# Allegro board hiveboard_v0_1.brd
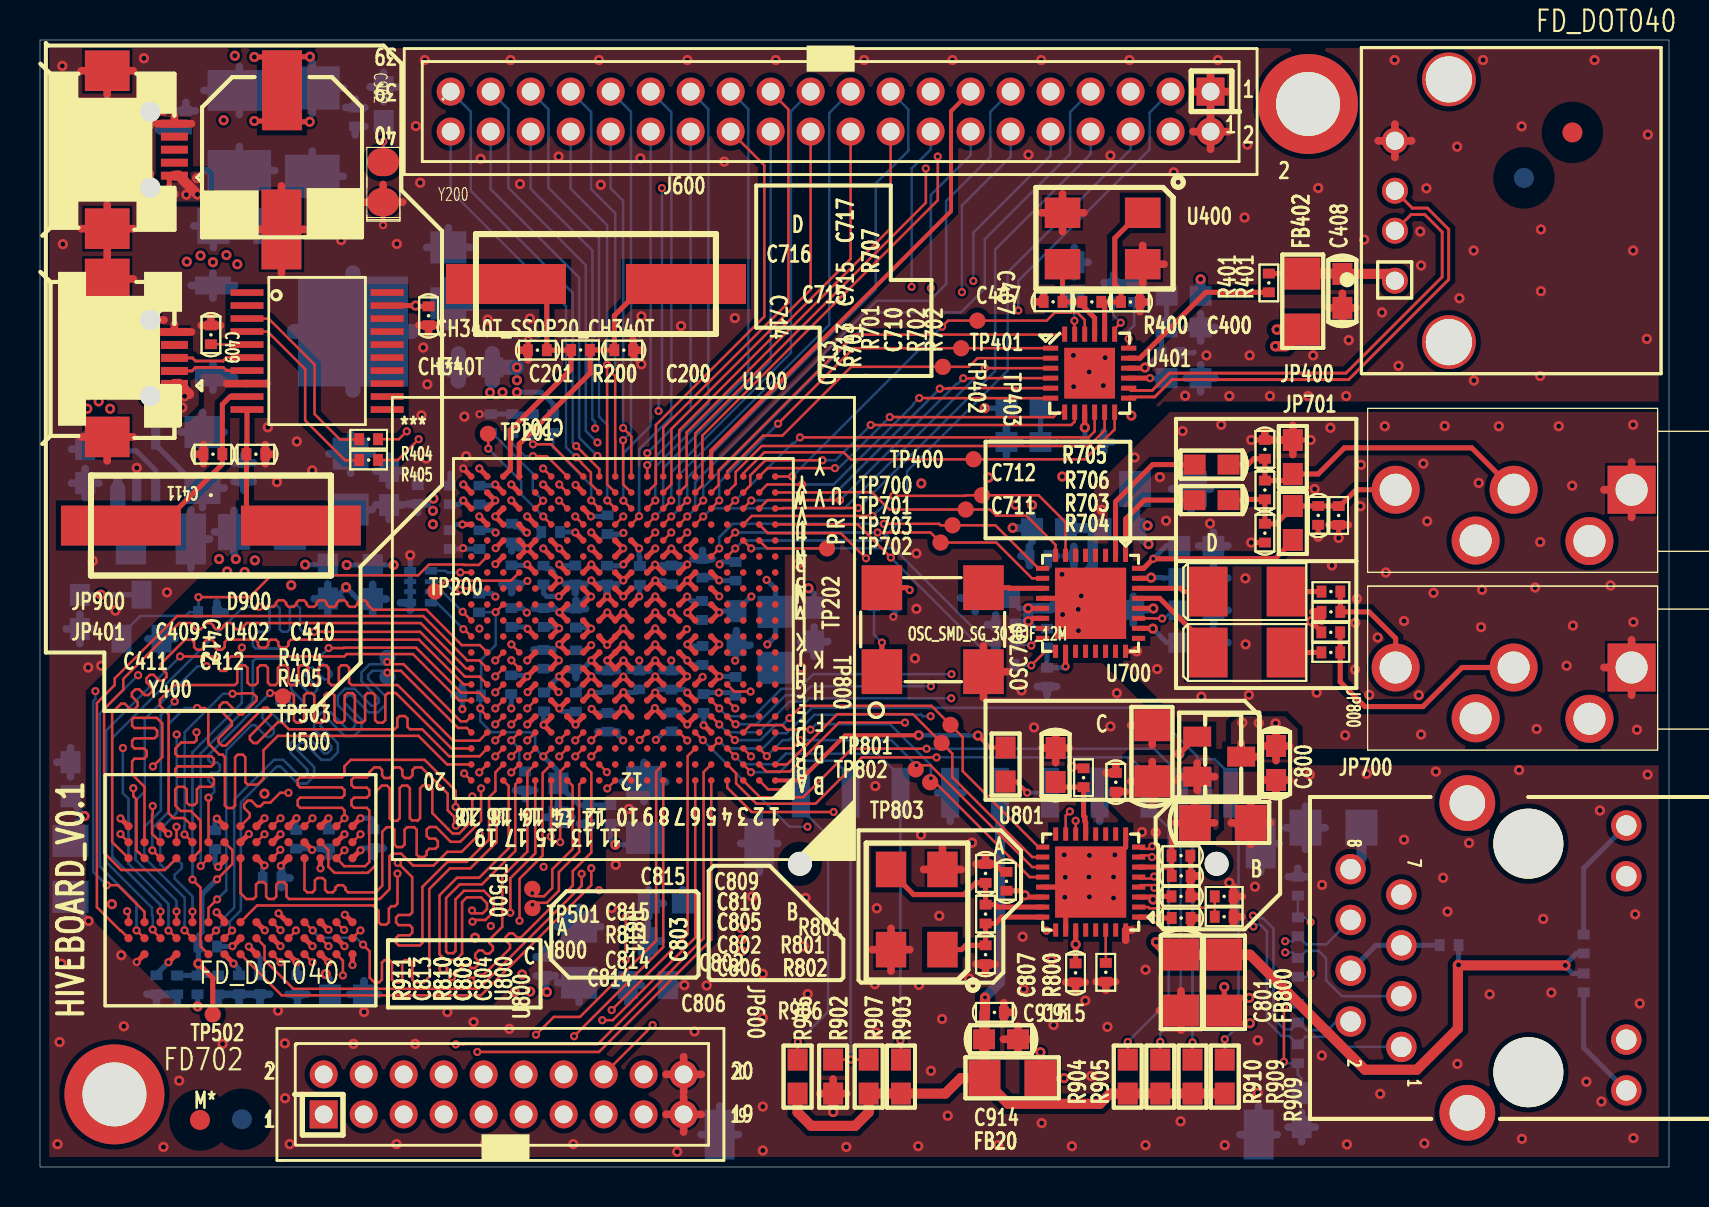
[diagram p0: board, top side]
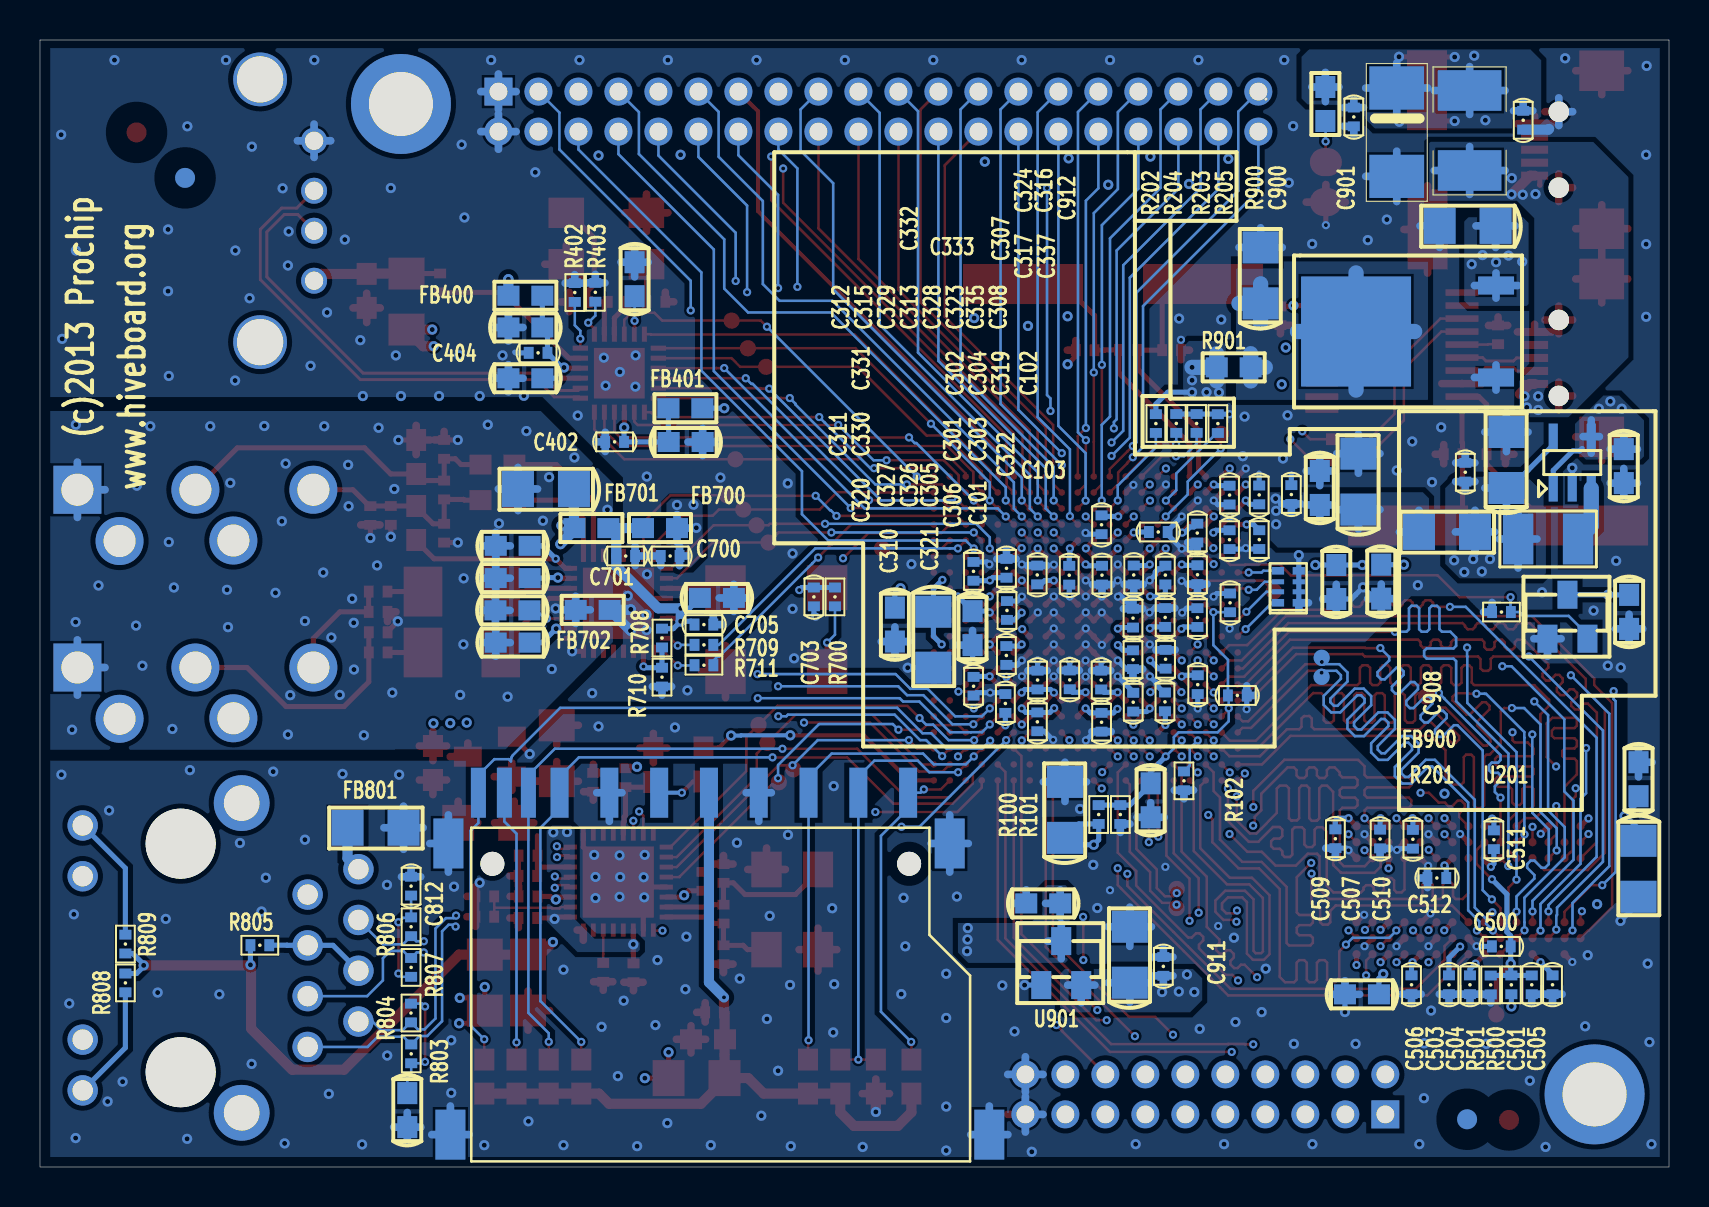
[diagram p1: board, bottom side, seen from below]

Outline 81.46 x 56.36 mm; copper layers: TOP, GND, INT1, VCC, GND1, BOTTOM. Coordinates in mm from the lower left corner of the outline.
Outline path: 20.17,53.39 20.14,53.42 ; 0,56.36 0,0 81.46,0 81.46,56.36 81.46,56.36 0,56.36

## Design rules (mm)
net group DP1: nets N27185589 N27185613
net group MATCH_LENTH_DQS0_DQS1: nets DDR_DQS1 DDR_DQS_B_1
net group USB: nets USB_DM USB_DP
net group MATCH_LENTH_ADD_ADD: nets DDR_BA0 DDR_BA1 DDR_BA2 DDR_CKE DDR_NCAS DDR_NCS DDR_NRAS DDR_NWE DDR_ODT T_DDR_A0 T_DDR_A1 T_DDR_A2 T_DDR_A3 T_DDR_A4 T_DDR_A5 T_DDR_A6 T_DDR_A7 T_DDR_A8 T_DDR_A9 T_DDR_A10 T_DDR_A11 T_DDR_A12 T_DDR_A13 T_DDR_A14
net group MATCH_LENTH_DQS0: nets DDR_CK DDR_NCK ETH_RXN ETH_RXP ETH_TXN ETH_TXP
net group MATCH_LENTH_DQS0_DQS0: nets DDR_DM0 DDR_DQS0 DDR_DQS_B_0 T_DDR_DQ0 T_DDR_DQ1 T_DDR_DQ2 T_DDR_DQ3 T_DDR_DQ4 T_DDR_DQ5 T_DDR_DQ6 T_DDR_DQ7
net group MATCH_LENTH_DQS1_DQS1: nets DDR_DM1 T_DDR_DQ8 T_DDR_DQ9 T_DDR_DQ10 T_DDR_DQ11 T_DDR_DQ12 T_DDR_DQ13 T_DDR_DQ14 T_DDR_DQ15

## Placement (name value [footprint] x y rotation side)
C100  1uF  [SC0603]  1.53 19.39 90 bottom
C101  0.1uF  [SC0402]  25.21 23.26 90 bottom
C102  0.1uF  [SC0402]  21.95 28.21 90 bottom
C103  0.01uF  [SC0402]  21.59 23.58 180 bottom
C104  1uF  [SC0603]  25.92 18.34 270 bottom
C200  20pF  [SC0402]  29.19 40.85 0 top
C201  20pF  [SC0402]  24.88 40.85 180 top
C202  0.1uF  [SC0603]  1.99 27.76 270 bottom
C300  10uF  [SC1206]  1.53 14.91 270 bottom
C301  0.1uF  [SC0402]  26.8 25.37 90 bottom
C302  0.1uF  [SC0402]  26.8 27.45 270 bottom
C303  0.1uF  [SC0402]  25.18 25.39 270 bottom
C304  0.1uF  [SC0402]  25.2 27.48 270 bottom
C305  0.01uF  [SC0402]  28.4 24.35 270 bottom
C306  0.01uF  [SC0402]  26.79 23.25 270 bottom
C307  0.01uF  [SC0402]  23.59 31.7 270 bottom
C308  0.1uF  [SC0402]  23.58 29.62 270 bottom
C309  1uF  [SC0603]  14.39 29.27 90 bottom
C310  0.1uF  [SC0402]  31.59 22.26 90 bottom
C311  0.1uF  [SC0402]  34.78 24.04 90 bottom
C312  0.1uF  [SC0402]  34.78 29.79 270 bottom
C313  0.01uF  [SC0402]  29.99 29.6 90 bottom
C314  10uF  [SC1206]  36.79 26.37 270 bottom
C315  0.01uF  [SC0402]  33.13 29.94 270 bottom
C316  0.01uF  [SC0402]  20.49 33.61 90 bottom
C317  0.01uF  [SC0402]  21.98 31.37 270 bottom
C318  1uF  [SC0603]  34.83 26.95 90 bottom
C319  0.1uF  [SC0402]  23.58 27.48 270 bottom
C320  0.1uF  [SC0402]  33.19 23.18 270 bottom
C321  0.01uF  [SC0402]  28.38 22.24 90 bottom
C322  0.01uF  [SC0402]  23.57 24.12 90 bottom
C323  0.1uF  [SC0402]  26.77 29.61 270 bottom
C324  0.1uF  [SC0402]  21.98 33.6 270 bottom
C325  1uF  [SC0603]  17.46 33.96 90 bottom
C326  0.1uF  [SC0402]  29.97 24.36 270 bottom
C327  0.1uF  [SC0402]  31.58 24.35 270 bottom
C328  0.1uF  [SC0402]  28.36 29.6 90 bottom
C329  0.1uF  [SC0402]  31.59 29.61 270 bottom
C330  0.01uF  [SC0402]  33.14 25.58 90 bottom
C331  0.01uF  [SC0402]  33.11 27.83 270 bottom
C332  0.1uF  [SC0402]  28.38 32.12 90 bottom
C333  0.1uF  [SC0402]  25.54 31.76 180 bottom
C334  1uF  [SC0603]  16.64 29.26 270 bottom
C335  0.1uF  [SC0402]  25.19 29.6 270 bottom
C336  1uF  [SC0603]  38.71 27.13 270 bottom
C337  0.1uF  [SC0402]  20.49 31.38 90 bottom
C400  12p/50V  [SC0402]  54.53 43.26 0 top
C401  1uF  [SC0603]  49.18 36.26 180 bottom
C402  0.1uF  [SC0402]  52.73 36.26 0 bottom
C403  4.7uF  [SC0603]  57.19 41.99 0 bottom
C404  0.1uF  [SC0402]  56.55 40.72 0 bottom
C405  1uF  [SC0603]  57.19 39.45 0 bottom
C406  1uF  [SC0603]  51.73 44.4 90 bottom
C407  12p/50V  [SC0402]  50.66 43.27 180 top
C408  2.2u/6.3V  [SC0603]  65.13 43.81 270 top
C409  0.01uF  [SC0402]  8.55 41.62 270 top
C410  0.1uF  [SC0402]  19.43 42.57 90 top
C411  22pF  [SC0402]  8.65 35.65 180 top
C412  22pF  [SC0402]  10.8 35.65 0 top
C500  0.1uF  [SC0402]  8.39 11.03 0 bottom
C501  0.01uF  [SC0402]  6.86 9.11 270 bottom
C502  10uF  [SC1206]  30.21 17.86 90 bottom
C503  0.1uF  [SC0402]  11 9.11 270 bottom
C504  0.1uF  [SC0402]  9.95 9.11 270 bottom
C505  0.1uF  [SC0402]  5.83 9.11 270 bottom
C506  0.01uF  [SC0402]  12.88 9.11 270 bottom
C507  0.01uF  [SC0402]  14.45 16.4 270 bottom
C508  1uF  [SC0603]  15.36 8.64 0 bottom
C509  0.1uF  [SC0402]  16.68 16.42 270 bottom
C510  0.1uF  [SC0402]  12.81 16.39 270 bottom
C511  0.01uF  [SC0402]  8.76 16.36 270 bottom
C512  0.01uF  [SC0402]  11.61 14.45 0 bottom
C700  0.1uF  [SC0402]  49.95 30.56 180 bottom
C701  0.1uF  [SC0402]  52.17 30.56 0 bottom
C702  10uF  [SC1206]  56.16 33.91 0 bottom
C703  0.1uF  [SC0402]  42.76 28.51 90 bottom
C704  4.7uF  [SC0603]  47.61 28.46 0 bottom
C705  0.1uF  [SC0402]  48.26 27.13 0 bottom
C706  4.7uF  [SC0603]  57.82 26.23 180 bottom
C707  4.7uF  [SC0603]  57.82 29.45 180 bottom
C708  4.7uF  [SC0603]  57.84 27.84 180 bottom
C709  4.7uF  [SC0603]  57.82 31.06 180 bottom
C710  220pF  [SC0402]  63.92 32.59 90 top
C711  47uF/16V  [SC3528]  58.4 25.73 0 top
C712  47uF/16V  [SC3528]  58.4 28.78 0 top
C713  33pF  [SC0402]  61.25 31.7 270 top
C714  1uF  [SC0603]  58.59 33.35 0 top
C715  33pF  [SC0402]  61.25 33.86 270 top
C716  1uF  [SC0603]  58.59 35.13 0 top
C717  33pF  [SC0402]  61.25 35.89 270 top
C800  4.7uF  [SC0603]  61.81 20.21 90 top
C801  10uF  [SC1206]  57.06 9.22 270 top
C802  0.1uF  [SC0402]  57.06 13.53 180 top
C803  0.01uF  [SC0402]  48.33 14.29 270 top
C804  10uF  [SC1206]  55.62 20.69 90 top
C805  0.1uF  [SC0402]  57.07 14.56 180 top
C806  0.1uF  [SC0402]  57.07 12.45 180 top
C807  0.1uF  [SC0402]  51.78 9.71 90 top
C808  0.01uF  [SC0402]  53.8 19.24 270 top
C809  10uF/6.3V  [SC1206]  59.15 17.21 0 top
C810  0.1uF  [SC0402]  57.06 15.57 180 top
C811  0.1uF  [SC0603]  63.09 2.84 270 bottom
C812  0.1uF  [SC0402]  62.9 14.05 270 bottom
C813  1uF  [SC0603]  50.79 20.1 90 top
C814  10pF  [SC0402]  47.28 10.62 270 top
C815  10pF  [SC0402]  47.28 14.68 90 top
C900  0.1uF  [SC0402]  15.76 52.51 90 bottom
C901  0.01uF  [SC0402]  7.29 52.35 90 bottom
C902  220uF/16V  [CAP_SMD65X65]  12.1 52.5 270 top
C903  10uF  [SC1206]  10.07 47.07 0 bottom
C904  22uF  [SC1206]  20.42 44.59 90 bottom
C905  4.7uF  [SC0603]  31.29 13.18 180 bottom
C906  4.7uF  [SC0603]  2.26 35.05 90 bottom
C907  10uF  [SC1206]  8.13 35.36 90 bottom
C908  0.1uF  [SC0402]  10.19 34.75 270 bottom
C909  10uF  [SC1206]  15.53 34.28 90 bottom
C910  10uF/6.3V  [SC1206]  26.96 10.62 90 bottom
C911  0.1uF  [SC0402]  25.29 10.03 270 bottom
C912  0.1uF  [SC0402]  18.89 33.63 270 bottom
C914  0.1uF  [SC0603]  48.06 6.39 0 top
C915  0.1uF  [SC0402]  47.73 7.73 180 top
D900  LED  [LED-0805]  17.16 50.25 90 top
F900  (2A, SMD, Poly Switch)  [FUSE5X5]  9.97 49.83 90 bottom
FB20  BLM21PG300SN1  [SR1206]  48.63 4.44 0 top
FB400  BLM21PG300SN1  [SR0603]  57.19 43.57 0 bottom
FB401  BLM21PG300SN1  [SR0603]  49.19 37.95 180 bottom
FB402  BLM21PG300SN1  [SR1206]  63.13 43.28 270 top
FB700  MU3261_471Y  [SR0603]  50.46 31.95 0 bottom
FB701  MU3261_471Y  [SR0603]  53.89 31.95 0 bottom
FB702  MU3261_471Y  [SR0603]  53.82 27.86 180 bottom
FB800  BLM21PG300SN1  [SR1206]  59.22 9.22 270 top
FB801  BLM21PG300SN1  500mA/0.1DCR  [SR1206]  64.68 16.97 0 bottom
FB900  BLM21PG300SN1  [SR1206]  11.1 31.76 0 bottom
FD503  FD_DOT040  [MARK]  10.1 2.39 180 bottom
FD700  FD_DOT040  [MARK]  74.21 49.47 180 bottom
FD701  FD_DOT040  [MARK]  76.63 51.74 0 top
FD702  FD_DOT040  [MARK]  8 2.35 0 top
J600  CON40A  [HD2X20_200]  39.54 52.78 180 top
JP400  USB TYPE A  [A_CN8-USB_A]  67.76 44.32 90 top
JP401  MINI-AB  [USB_MICRO_SMT]  6.72 39.16 90 top
JP600  HEADER 10X2  [HD2X10_200]  33.19 3.63 0 top
JP700  PHONOJACK STEREO_15  [EARJACK]  79.59 24.98 0 top
JP701  PHONOJACK STEREO_15  [EARJACK]  79.59 33.87 0 top
JP800  HR911105A  [HR911105_A]  74.43 10.46 270 top
JP900  MINI-AB  [USB_MICRO_SMT]  6.72 49.58 90 top
JP901  SD_HALF  [SD_CARD]  40.54 18.72 0 bottom
L900  2.2uH(LQH32CN2R2M33)  [SR1210]  6.05 31.41 0 bottom
NOREF  -  [unnamed]  3.72 3.63 0 top
NOREF#2  -  [unnamed]  63.41 53.16 0 top
OSC700  12M  [SG_3030JF]  44.64 26.87 0 top
R100  100K/1%  [SR0402]  28.52 17.63 270 bottom
R101  100K/1%  [SR0402]  27.44 17.63 90 bottom
R102  240R 1%  [SR0402]  24.26 19.31 90 bottom
R200  1M  [SR0402]  27.03 40.86 180 top
R201  100K  [SR0402]  8.38 27.75 0 bottom
R202  10K  [SR0402]  25.66 37.18 90 bottom
R203  10K  [SR0402]  23.62 37.19 270 bottom
R204  10K  [SR0402]  24.64 37.19 90 bottom
R205  10K  [SR0402]  22.56 37.18 270 bottom
R400  1M  [SR0402]  52.6 43.26 180 top
R401  1K  [SR0402]  61.45 44.21 90 top
R402  0R  [SR0402]  54.72 43.73 90 bottom
R403  8.06K/1%  [SR0402]  53.69 43.74 90 bottom
R404  0R  [SR0402]  16.43 36.4 0 top
R405  0R  [SR0402]  16.43 35.36 0 top
R500  100K/1%  [SR0402]  7.88 9.11 270 bottom
R501  100K/1%  [SR0402]  8.92 9.11 90 bottom
R700  1K  [SR0402]  41.71 28.51 270 bottom
R701  680R  [SR0603]  62.65 32.21 270 top
R702  47K  [SR0402]  64.94 32.58 270 top
R703  2.2K  [SR0402]  64.55 26.74 0 top
R704  16R  [SR0402]  64.55 25.73 180 top
R705  16R  [SR0402]  64.56 28.78 180 top
R706  2.2K  [SR0402]  64.56 27.76 180 top
R707  0R  [SR0603]  62.65 35.51 90 top
R708  100K  NC  [SR0402]  50.36 26.45 270 bottom
R709  0R  [SR0402]  48.26 26.11 0 bottom
R710  4.7K  [SR0402]  50.36 24.5 270 bottom
R711  0R  [SR0402]  48.26 25.09 0 bottom
R800  100K  [SR0402]  53.3 9.74 90 top
R801  24.3K  1%  [SR0402]  59.22 13.53 180 top
R802  24.9K  1%  [SR0402]  59.22 12.52 180 top
R803  49.9R  [SR0402]  62.9 5.66 90 bottom
R804  49.9R  [SR0402]  62.91 7.7 270 bottom
R805  0R  [SR0402]  70.47 11.09 180 bottom
R806  49.9R  [SR0402]  62.9 12.01 90 bottom
R807  49.9R  [SR0402]  62.9 9.98 270 bottom
R808  330R  [SR0402]  77.19 9.21 90 bottom
R809  330R  [SR0402]  77.19 11.15 270 bottom
R810  10K  [SR0402]  52.19 19.47 270 top
R811  10K  [SR0402]  47.28 12.65 270 top
R900  1K  [SR0603]  17.18 53.16 270 bottom
R901  0R  [SR0603]  21.77 39.99 180 bottom
R902  470k  [SR0603]  39.66 4.52 270 top
R903  4.7k  [SR0603]  43.05 4.52 270 top
R904  100k  [SR0603]  54.4 4.52 270 top
R905  100k  [SR0603]  56.02 4.52 270 top
R906  100k  [SR0603]  37.89 4.52 270 top
R907  NC  [SR0603]  41.44 4.52 270 top
R909  100k  [SR0603]  59.25 4.52 270 top
R910  100k  [SR0603]  57.63 4.52 270 top
R911  22R  [SR0603]  48.29 20.13 270 top
RN100  10Kx4  [SRN8]  19.03 29.02 90 bottom
TP200  TP_SS  [TP_08MM]  19.76 28.78 0 top
TP201  TP_SS  [TP_08MM]  22.4 36.67 0 top
TP202  TP_SS  [TP_08MM]  39.36 30.94 0 top
TP400  TP_SS  [TP_08MM]  46.69 35.39 0 top
TP401  TP_SS  [TP_08MM]  46.88 42.33 0 top
TP402  TP_SS  [TP_08MM]  45.15 40.02 0 top
TP403  TP_SS  [TP_08MM]  46.06 40.94 0 top
TP500  TP_SS  [TP_08MM]  24.62 13.91 0 top
TP501  TP_SS  [TP_08MM]  24.63 12.95 0 top
TP502  TP_SS  [TP_08MM]  8.64 7.63 0 top
TP503  TP_SS  [TP_08MM]  12.15 23.53 0 top
TP504  TP_SS  [TP_08MM]  17.37 25.47 180 bottom
TP505  TP_SS  [TP_08MM]  17.37 24.51 180 bottom
TP700  TP_SS  [TP_08MM]  47.11 33.59 0 top
TP701  TP_SS  [TP_08MM]  46.29 32.88 0 top
TP702  TP_SS  [TP_08MM]  45.04 31.23 0 top
TP703  TP_SS  [TP_08MM]  45.63 32.09 0 top
TP800  TP_SS  [TP_08MM]  45.53 22.11 0 top
TP801  TP_SS  [TP_08MM]  45.09 21.21 0 top
TP802  TP_SS  [TP_08MM]  43.79 19.89 0 top
TP803  TP_SS  [TP_08MM]  44.51 19.24 0 top
U100  SEP6200  [BGA400-080_1700X1700]  29.17 26.93 180 top
U201  CAT809_EUR-R  [SOT23]  5.08 27.52 180 bottom
U400  26M  [SX4_35X60]  55.14 47.72 180 top
U401  USB3343-CP-TR  [QFN24]  52.49 39.7 0 top
U402  CH340T  [SSOP20]  13.86 40.8 0 top
U500  HY5PS1G1631C  [A_FBGA84_E]  15.63 17.04 180 top
U700  WM8976  [QFN32]  52.54 28.19 270 top
U800  BL8552CB3TR12/AME8822AEEV180Z  [SOT23]  58.97 20.52 270 top
U801  AW6688  [QFN32]  52.54 14.25 180 top
U900  BL1085-33CY  [TO_252]  8.65 39.48 90 bottom
U901  BL8552CB3TR18/AME8822AEEV180Z  [SOT23]  30.39 10.2 180 bottom
U902  RT8008-12PB  [SOT23_5]  4.84 35.23 90 bottom
Y200  HC-49SMA  [XTAL2-200_SMT]  23.3 44.16 0 top
Y400  HC-49SMA  [XTAL2-200_SMT]  13.05 32.08 180 top
Y800  HCX-6SB_25Mhz  [SX4_35X60]  45.13 10.87 90 top
ZD900  1SMB5920BT3G  [SMB403A]  13.62 49.54 90 bottom

## Library data of the parts
C100-C104 C200 C201 C301-C313 C315-C337 C411 C412 C500 C501 C503-C512 = CAP NP_0
C202 C401-C406 C408-C410 C700 C701 C703-C710 C713-C717 C800 C802 C803 C805-C808 C810-C815 C900 C901 C905 C906 C908 C911 C912 C915 = CAP NP
C300 C314 C502 C702 C711 C712 C801 C804 C809 C902-C904 C907 C909 C910 = CAP POL
C400 C407 = CAPACITOR NON-POL
C914 = CAPNP
D900 = LED
F900 = FUSE
FB20 FB400-FB402 FB700-FB702 FB800 FB801 FB900 = FB
FD503 FD700-FD702 = FD_DOT040
J600 = CON40A
JP400 = USB TYPE A
JP401 JP900 = USB TYPE MICRO_AB
JP600 = HEADER 10X2
JP700 JP701 = PHONOJACK STEREO_15
JP800 = HR911105A_4
JP901 = SD_HALF
L900 = INDUCTOR
OSC700 = OSC_SMD
R100-R102 R200 R202-R205 R500 R501 R800-R811 R901 = R_0
R201 R400-R405 R700-R711 R900 R902-R907 R909-R911 = R
RN100 = RESAR_IS_4_SM
TP200-TP202 TP400-TP403 TP500-TP505 TP700-TP703 TP800-TP803 = TP_SS
U100 = SEP0611
U201 = CAT809
U400 = CRYSTAL_0
U401 = USB3343
U402 = CH340T: Tolerance: ***; User Part Number: ***
U500 = MT47H128M16_0
U700 = WM8976_0
U800 U900 U901 = BL1085
U801 = AW6688
U902 = LTC3406_V
Y200 Y400 = CRYSTAL
Y800 = CRYSTAL_1
ZD900 = ZD

## Footprints (pads in the part's own frame, mm; a bottom-side part is the same pattern mirrored in y, then rotated)
A_CN8-USB_A
  round 2.69 hole 2.31: (-3.07,-2.7) (10.07,-2.7)
  round 1.3 hole 0.91: 1(0,0) 2(2.5,0) 3(4.5,0) 4(7,0)
A_FBGA84_E
  round 0.41 smd: A1(0,0) A2(0,0.8) A3(0,1.6) A7(0,4.8) A8(0,5.6) A9(0,6.4) B1(0.8,0) B2(0.8,0.8) B3(0.8,1.6) B7(0.8,4.8) B8(0.8,5.6) B9(0.8,6.4) C1(1.6,0) C2(1.6,0.8) C3(1.6,1.6) C7(1.6,4.8) C8(1.6,5.6) C9(1.6,6.4) D1(2.4,0) D2(2.4,0.8) D3(2.4,1.6) D7(2.4,4.8) D8(2.4,5.6) D9(2.4,6.4) E1(3.2,0) E2(3.2,0.8) E3(3.2,1.6) E7(3.2,4.8) E8(3.2,5.6) E9(3.2,6.4) F1(4,0) F2(4,0.8) F3(4,1.6) F7(4,4.8) F8(4,5.6) F9(4,6.4) G1(4.8,0) G2(4.8,0.8) G3(4.8,1.6) G7(4.8,4.8) G8(4.8,5.6) G9(4.8,6.4) H1(5.6,0) H2(5.6,0.8) H3(5.6,1.6) H7(5.6,4.8) H8(5.6,5.6) H9(5.6,6.4) J1(6.4,0) J2(6.4,0.8) J3(6.4,1.6) J7(6.4,4.8) J8(6.4,5.6) J9(6.4,6.4) K2(7.2,0.8) K3(7.2,1.6) K7(7.2,4.8) K8(7.2,5.6) K9(7.2,6.4) L1(8,0) L2(8,0.8) L3(8,1.6) L7(8,4.8) L8(8,5.6) M2(8.8,0.8) M3(8.8,1.6) M7(8.8,4.8) M8(8.8,5.6) M9(8.8,6.4) N1(9.6,0) N2(9.6,0.8) N3(9.6,1.6) N7(9.6,4.8) N8(9.6,5.6) P2(10.4,0.8) P3(10.4,1.6) P7(10.4,4.8) P8(10.4,5.6) P9(10.4,6.4) R1(11.2,0) R2(11.2,0.8) R3(11.2,1.6) R7(11.2,4.8) R8(11.2,5.6)
BGA400-080_1700X1700
  round 0.33 smd: A1(-7.6,7.6) A2(-6.8,7.6) A3(-6,7.6) A4(-5.2,7.6) A5(-4.4,7.6) A6(-3.6,7.6) A7(-2.8,7.6) A8(-2,7.6) A9(-1.2,7.6) A10(-0.4,7.6) A11(0.4,7.6) A12(1.2,7.6) A13(2,7.6) A14(2.8,7.6) A15(3.6,7.6) A16(4.4,7.6) A17(5.2,7.6) A18(6,7.6) A19(6.8,7.6) A20(7.6,7.6) B1(-7.6,6.8) B2(-6.8,6.8) B3(-6,6.8) B4(-5.2,6.8) B5(-4.4,6.8) B6(-3.6,6.8) B7(-2.8,6.8) B8(-2,6.8) B9(-1.2,6.8) B10(-0.4,6.8) B11(0.4,6.8) B12(1.2,6.8) B13(2,6.8) B14(2.8,6.8) B15(3.6,6.8) B16(4.4,6.8) B17(5.2,6.8) B18(6,6.8) B19(6.8,6.8) B20(7.6,6.8) C1(-7.6,6) C2(-6.8,6) C3(-6,6) C4(-5.2,6) C5(-4.4,6) C6(-3.6,6) C7(-2.8,6) C8(-2,6) C9(-1.2,6) C10(-0.4,6) C11(0.4,6) C12(1.2,6) C13(2,6) C14(2.8,6) C15(3.6,6) C16(4.4,6) C17(5.2,6) C18(6,6) C19(6.8,6) C20(7.6,6) D1(-7.6,5.2) D2(-6.8,5.2) D3(-6,5.2) D4(-5.2,5.2) D5(-4.4,5.2) D6(-3.6,5.2) D7(-2.8,5.2) D8(-2,5.2) D9(-1.2,5.2) D10(-0.4,5.2) D11(0.4,5.2) D12(1.2,5.2) D13(2,5.2) D14(2.8,5.2) D15(3.6,5.2) D16(4.4,5.2) D17(5.2,5.2) D18(6,5.2) D19(6.8,5.2) D20(7.6,5.2) E1(-7.6,4.4) E2(-6.8,4.4) E3(-6,4.4) E4(-5.2,4.4) E5(-4.4,4.4) E6(-3.6,4.4) E7(-2.8,4.4) E8(-2,4.4) E9(-1.2,4.4) E10(-0.4,4.4) E11(0.4,4.4) E12(1.2,4.4) E13(2,4.4) E14(2.8,4.4) E15(3.6,4.4) E16(4.4,4.4) E17(5.2,4.4) E18(6,4.4) E19(6.8,4.4) E20(7.6,4.4) F1(-7.6,3.6) F2(-6.8,3.6) F3(-6,3.6) F4(-5.2,3.6) F5(-4.4,3.6) F6(-3.6,3.6) F7(-2.8,3.6) F8(-2,3.6) F9(-1.2,3.6) F10(-0.4,3.6) F11(0.4,3.6) F12(1.2,3.6) F13(2,3.6) F14(2.8,3.6) F15(3.6,3.6) F16(4.4,3.6) F17(5.2,3.6) F18(6,3.6) F19(6.8,3.6) F20(7.6,3.6) G1(-7.6,2.8) G2(-6.8,2.8) G3(-6,2.8) G4(-5.2,2.8) G5(-4.4,2.8) G6(-3.6,2.8) G7(-2.8,2.8) G8(-2,2.8) G9(-1.2,2.8) G10(-0.4,2.8) G11(0.4,2.8) G12(1.2,2.8) G13(2,2.8) G14(2.8,2.8) G15(3.6,2.8) G16(4.4,2.8) G17(5.2,2.8) G18(6,2.8) G19(6.8,2.8) G20(7.6,2.8) H1(-7.6,2) H2(-6.8,2) H3(-6,2) H4(-5.2,2) H5(-4.4,2) H6(-3.6,2) H7(-2.8,2) H8(-2,2) H9(-1.2,2) H10(-0.4,2) H11(0.4,2) H12(1.2,2) H13(2,2) H14(2.8,2) H15(3.6,2) H16(4.4,2) H17(5.2,2) H18(6,2) H19(6.8,2) H20(7.6,2) J1(-7.6,1.2) J2(-6.8,1.2) J3(-6,1.2) J4(-5.2,1.2) J5(-4.4,1.2) J6(-3.6,1.2) J7(-2.8,1.2) J8(-2,1.2) J9(-1.2,1.2) J10(-0.4,1.2) J11(0.4,1.2) J12(1.2,1.2) J13(2,1.2) J14(2.8,1.2) J15(3.6,1.2) J16(4.4,1.2) J17(5.2,1.2) J18(6,1.2) J19(6.8,1.2) J20(7.6,1.2) K1(-7.6,0.4) K2(-6.8,0.4) K3(-6,0.4) K4(-5.2,0.4) K5(-4.4,0.4) K6(-3.6,0.4) K7(-2.8,0.4) K8(-2,0.4) K9(-1.2,0.4) K10(-0.4,0.4) K11(0.4,0.4) K12(1.2,0.4) K13(2,0.4) K14(2.8,0.4) K15(3.6,0.4) K16(4.4,0.4) K17(5.2,0.4) K18(6,0.4) K19(6.8,0.4) K20(7.6,0.4) L1(-7.6,-0.4) L2(-6.8,-0.4) L3(-6,-0.4) L4(-5.2,-0.4) L5(-4.4,-0.4) L6(-3.6,-0.4) L7(-2.8,-0.4) L8(-2,-0.4) L9(-1.2,-0.4) L10(-0.4,-0.4) L11(0.4,-0.4) L12(1.2,-0.4) L13(2,-0.4) L14(2.8,-0.4) L15(3.6,-0.4) L16(4.4,-0.4) L17(5.2,-0.4) L18(6,-0.4) L19(6.8,-0.4) L20(7.6,-0.4) M1(-7.6,-1.2) M2(-6.8,-1.2) M3(-6,-1.2) M4(-5.2,-1.2) M5(-4.4,-1.2) M6(-3.6,-1.2) M7(-2.8,-1.2) M8(-2,-1.2) M9(-1.2,-1.2) M10(-0.4,-1.2) M11(0.4,-1.2) M12(1.2,-1.2) M13(2,-1.2) M14(2.8,-1.2) M15(3.6,-1.2) M16(4.4,-1.2) M17(5.2,-1.2) M18(6,-1.2) M19(6.8,-1.2) M20(7.6,-1.2) N1(-7.6,-2) N2(-6.8,-2) N3(-6,-2) N4(-5.2,-2) N5(-4.4,-2) N6(-3.6,-2) N7(-2.8,-2) N8(-2,-2) N9(-1.2,-2) N10(-0.4,-2) N11(0.4,-2) N12(1.2,-2) N13(2,-2) N14(2.8,-2) N15(3.6,-2) N16(4.4,-2) N17(5.2,-2) N18(6,-2) N19(6.8,-2) N20(7.6,-2) P1(-7.6,-2.8) P2(-6.8,-2.8) P3(-6,-2.8) P4(-5.2,-2.8) P5(-4.4,-2.8) P6(-3.6,-2.8) P7(-2.8,-2.8) P8(-2,-2.8) P9(-1.2,-2.8) P10(-0.4,-2.8) P11(0.4,-2.8) P12(1.2,-2.8) P13(2,-2.8) P14(2.8,-2.8) P15(3.6,-2.8) P16(4.4,-2.8) P17(5.2,-2.8) P18(6,-2.8) P19(6.8,-2.8) P20(7.6,-2.8) R1(-7.6,-3.6) R2(-6.8,-3.6) R3(-6,-3.6) R4(-5.2,-3.6) R5(-4.4,-3.6) R6(-3.6,-3.6) R7(-2.8,-3.6) R8(-2,-3.6) R9(-1.2,-3.6) R10(-0.4,-3.6) R11(0.4,-3.6) R12(1.2,-3.6) R13(2,-3.6) R14(2.8,-3.6) R15(3.6,-3.6) R16(4.4,-3.6) R17(5.2,-3.6) R18(6,-3.6) R19(6.8,-3.6) R20(7.6,-3.6) T1(-7.6,-4.4) T2(-6.8,-4.4) T3(-6,-4.4) T4(-5.2,-4.4) T5(-4.4,-4.4) T6(-3.6,-4.4) T7(-2.8,-4.4) T8(-2,-4.4) T9(-1.2,-4.4) T10(-0.4,-4.4) T11(0.4,-4.4) T12(1.2,-4.4) T13(2,-4.4) T14(2.8,-4.4) T15(3.6,-4.4) T16(4.4,-4.4) T17(5.2,-4.4) T18(6,-4.4) T19(6.8,-4.4) T20(7.6,-4.4) U1(-7.6,-5.2) U2(-6.8,-5.2) U3(-6,-5.2) U4(-5.2,-5.2) U5(-4.4,-5.2) U6(-3.6,-5.2) U7(-2.8,-5.2) U8(-2,-5.2) U9(-1.2,-5.2) U10(-0.4,-5.2) U11(0.4,-5.2) U12(1.2,-5.2) U13(2,-5.2) U14(2.8,-5.2) U15(3.6,-5.2) U16(4.4,-5.2) U17(5.2,-5.2) U18(6,-5.2) U19(6.8,-5.2) U20(7.6,-5.2) V1(-7.6,-6) V2(-6.8,-6) V3(-6,-6) V4(-5.2,-6) V5(-4.4,-6) V6(-3.6,-6) V7(-2.8,-6) V8(-2,-6) V9(-1.2,-6) V10(-0.4,-6) V11(0.4,-6) V12(1.2,-6) V13(2,-6) V14(2.8,-6) V15(3.6,-6) V16(4.4,-6) V17(5.2,-6) V18(6,-6) V19(6.8,-6) V20(7.6,-6) W1(-7.6,-6.8) W2(-6.8,-6.8) W3(-6,-6.8) W4(-5.2,-6.8) W5(-4.4,-6.8) W6(-3.6,-6.8) W7(-2.8,-6.8) W8(-2,-6.8) W9(-1.2,-6.8) W10(-0.4,-6.8) W11(0.4,-6.8) W12(1.2,-6.8) W13(2,-6.8) W14(2.8,-6.8) W15(3.6,-6.8) W16(4.4,-6.8) W17(5.2,-6.8) W18(6,-6.8) W19(6.8,-6.8) W20(7.6,-6.8) Y1(-7.6,-7.6) Y2(-6.8,-7.6) Y3(-6,-7.6) Y4(-5.2,-7.6) Y5(-4.4,-7.6) Y6(-3.6,-7.6) Y7(-2.8,-7.6) Y8(-2,-7.6) Y9(-1.2,-7.6) Y10(-0.4,-7.6) Y11(0.4,-7.6) Y12(1.2,-7.6) Y13(2,-7.6) Y14(2.8,-7.6) Y15(3.6,-7.6) Y16(4.4,-7.6) Y17(5.2,-7.6) Y18(6,-7.6) Y19(6.8,-7.6) Y20(7.6,-7.6)
CAP_SMD65X65
  rect 4x2 smd: 1(-1.35,0) 2(5.61,-0.03)
EARJACK
  rect 2.4x2.4 hole 1.6: 1(0,0)
  round 2.4 hole 1.6: 2(-5.9,0) 3(-11.801,0) 4(-7.8,-2.54) 5(-2.108,-2.565)
FUSE5X5
  rect 2.03x3.18 smd: 1(0,0) 2(4,0)
HD2X10_200
  rect 1.4x1.4 hole 0.89: 1(-19,-1)
  round 1.4 hole 0.89: 2(-19,1) 3(-17,-1) 4(-17,1) 5(-15,-1) 6(-15,1) 7(-13,-1) 8(-13,1) 9(-11,-1) 10(-11,1) 11(-9,-1) 12(-9,1) 13(-7,-1) 14(-7,1) 15(-5,-1) 16(-5,1) 17(-3,-1) 18(-3,1) 19(-1,-1) 20(-1,1)
HD2X20_200
  rect 1.4x1.4 hole 0.89: 1(-19,-1)
  round 1.4 hole 0.89: 2(-19,1) 3(-17,-1) 4(-17,1) 5(-15,-1) 6(-15,1) 7(-13,-1) 8(-13,1) 9(-11,-1) 10(-11,1) 11(-9,-1) 12(-9,1) 13(-7,-1) 14(-7,1) 15(-5,-1) 16(-5,1) 17(-3,-1) 18(-3,1) 19(-1,-1) 20(-1,1) 21(1,-1) 22(1,1) 23(3,-1) 24(3,1) 25(5,-1) 26(5,1) 27(7,-1) 28(7,1) 29(9,-1) 30(9,1) 31(11,-1) 32(11,1) 33(13,-1) 34(13,1) 35(15,-1) 36(15,1) 37(17,-1) 38(17,1) 39(19,-1) 40(19,1)
HR911105_A
  round 3.5 hole 3.5 unplated: (-5.715,0) (5.715,0)
  round 1.52 hole 1.02: 1(4.45,-6.35) 2(3.18,-8.89) 3(1.91,-6.35) 4(0.64,-8.89) 5(-0.63,-6.35) 6(-1.9,-8.89) 7(-3.17,-6.35) 8(-4.44,-8.89) 9(6.624,4.9) 10(4.084,4.9) 11(-4.084,4.9) 12(-6.624,4.9)
  round 2.79 hole 1.78: 15(-7.744,-3.051) 16(7.744,-3.051)
LED-0805
  custom 1.4x1.6 smd: 1(0,0) 2(-1.999,0)
MARK
  round 1 smd: 1(0,0)
QFN24
  rect 0.76x0.25 smd: 1(-1.951,1.25) 2(-1.951,0.749) 3(-1.951,0.249) 4(-1.951,-0.249) 5(-1.951,-0.749) 6(-1.951,-1.25) 13(1.951,-1.25) 14(1.951,-0.749) 15(1.951,-0.249) 16(1.951,0.249) 17(1.951,0.749) 18(1.951,1.25)
  rect 0.25x0.76 smd: 7(-1.25,-1.951) 8(-0.749,-1.951) 9(-0.249,-1.951) 10(0.249,-1.951) 11(0.749,-1.951) 12(1.25,-1.951) 19(1.25,1.951) 20(0.749,1.951) 21(0.249,1.951) 22(-0.249,1.951) 23(-0.749,1.951) 24(-1.25,1.951)
  rect 2.54x2.54 smd: 25(0,0)
QFN32
  rect 0.66x0.25 smd: 1(-2.4,1.75) 2(-2.4,1.25) 3(-2.4,0.75) 4(-2.4,0.25) 5(-2.4,-0.25) 6(-2.4,-0.75) 7(-2.4,-1.25) 8(-2.4,-1.75) 17(2.4,-1.75) 18(2.4,-1.25) 19(2.4,-0.75) 20(2.4,-0.25) 21(2.4,0.25) 22(2.4,0.75) 23(2.4,1.25) 24(2.4,1.75)
  rect 0.25x0.66 smd: 9(-1.75,-2.4) 10(-1.25,-2.4) 11(-0.75,-2.4) 12(-0.25,-2.4) 13(0.25,-2.4) 14(0.75,-2.4) 15(1.25,-2.4) 16(1.75,-2.4) 25(1.75,2.4) 26(1.25,2.4) 27(0.75,2.4) 28(0.25,2.4) 29(-0.25,2.4) 30(-0.75,2.4) 31(-1.25,2.4) 32(-1.75,2.4)
  rect 3.56x3.56 smd: 33(0,0)
SC0402
  rect 0.49x0.6 smd: 1(-0.47,0) 2(0.47,0)
SC0603
  rect 1.1x1 smd: 1(-0.85,0) 2(0.85,0)
SC1206
  rect 1.6x1.8 smd: 1(-1.4,0) 2(1.4,0)
SC3528
  rect 1.93x2.49 smd: 1(0.025,0) 2(3.912,0)
SD_CARD
  round 1.2 hole 1.7 unplated: (-2.54,3.556)
  round 1.2 hole 1.2 unplated: (18.3,3.556)
  rect 0.9x2.5 smd: 1(0,0) 2(2.49,0) 3(4.98,0) 4(7.47,0) 5(9.96,0) 6(12.45,0) 7(14.94,0) 9(-2.49,0)
  rect 0.75x2.5 smd: 8(16.5,0) 10(17.7,0) 11(19,0)
  rect 1.5x2.5 smd: 12(20.5,2.54) 13(20.4,17.1) 14(-6.55,17.1) 15(-4.57,2.54)
SG_3030JF
  rect 2.03x2.24 smd: 1(-2.54,-2.101) 2(2.54,-2.101) 3(2.54,2.101) 4(-2.54,2.101)
SMB403A
  rect 2.16x2.74 smd: 1(0,0) 2(4.42,0)
SOT23
  rect 1x1.4 smd: 1(-1,-1.1) 2(1,-1.1) 3(0,1.1)
SOT23_5
  rect 1.3x0.46 smd: 1(-1.3,0.95) 2(-1.3,0) 3(-1.3,-0.95) 4(1.3,-0.95) 5(1.3,0.95)
SR0402
  rect 0.49x0.6 smd: 1(-0.47,0) 2(0.47,0)
SR0603
  rect 1.1x1 smd: 1(-0.85,0) 2(0.85,0)
SR1206
  rect 1.6x1.8 smd: 1(-1.4,0) 2(1.4,0)
SR1210
  rect 1.52x2.54 smd: 1(-1.499,0) 2(1.499,0)
SRN8
  rect 0.38x0.61 smd: 1(-0.8,-0.52) 4(0.8,-0.52) 5(0.8,0.52) 8(-0.8,0.52)
  rect 0.25x0.61 smd: 2(-0.25,-0.52) 3(0.25,-0.52) 6(0.25,0.52) 7(-0.25,0.52)
SSOP20
  rect 1.65x0.33 smd: 1(-3.505,2.926) 2(-3.505,2.276) 3(-3.505,1.626) 4(-3.505,0.975) 5(-3.505,0.325) 6(-3.505,-0.325) 7(-3.505,-0.975) 8(-3.505,-1.626) 9(-3.505,-2.276) 10(-3.505,-2.926) 11(3.505,-2.926) 12(3.505,-2.276) 13(3.505,-1.626) 14(3.505,-0.975) 15(3.505,-0.325) 16(3.505,0.325) 17(3.505,0.975) 18(3.505,1.626) 19(3.505,2.276) 20(3.505,2.926)
SX4_35X60
  rect 1.78x1.52 smd: 1(0,0) 2(4.01,0) 3(4.01,2.57) 4(0,2.57)
TO_252
  rect 0.9x1.8 smd: 1(0,0) 3(4.6,0)
  rect 5.5x5.5 smd: 2(2.3,7)
TP_08MM
  round 0.81 smd: 1(0,0)
unnamed
  round 5 hole 3.2: 1(0,0)
USB_MICRO_SMT
  round 1.02 hole 1.02 unplated: (-0.6,1.21) (3.2,1.21)
  rect 0.4x1.35 smd: 1(0,0) 2(0.65,0) 3(1.3,0) 4(1.95,0) 5(2.6,0)
  rect 2.03x2.24 smd: 6(-2.65,3.36) 7(5.25,3.36)
XTAL2-200_SMT
  rect 6x2 smd: 1(0,0) 2(9,0)

## Nets
GND: C100.2 C101.2 C102.2 C103.2 C104.2 C200.2 C201.2 C202.2 C300.2 C301.1 C302.1 C303.1 C304.1 C305.1 C306.1 C307.2 C308.2 C309.1 C310.1 C311.1 C312.1 C313.1 C314.2 C315.1 C316.2 C317.2 C318.1 C319.1 C320.1 C321.1 C322.1 C323.2 C324.2 C325.2 C326.1 C327.1 C328.1 C329.1 C330.1 C331.1 C332.1 C333.2 C334.2 C335.1 C336.2 C337.1 C400.2 C401.2 C402.2 C403.2 C404.2 C405.2 C406.2 C407.2 C408.2 C409.1 C410.1 C411.2 C412.2 C500.2 C501.2 C502.2 C503.2 C504.2 C505.2 C506.2 C507.2 C508.2 C509.2 C510.2 C511.2 C512.2 C700.1 C701.1 C703.1 C704.1 C705.1 C800.1 C801.2 C802.1 C803.1 C804.2 C805.1 C806.1 C807.1 C808.1 C809.2 C810.1 C811.2 C812.1 C813.2 C814.2 C815.2 C900.1 C901.1 C902.2 C903.2 C904.2 C905.1 C906.1 C907.2 C908.1 C909.2 C910.2 C911.1 C912.1 C914.2 C915.1 D900.2(CATHODE) FB702.2 FB801.1 J600.1 J600.2 JP400.4(GND) JP401.5(GND) JP401.6(SHIELD1) JP401.7(SHIELD2) JP600.19 JP600.20 JP900.5(GND) JP900.6(SHIELD1) JP900.7(SHIELD2) JP901.3(VSS1) JP901.6(VSS2) JP901.12(M1) JP901.13(M2) JP901.14(M3) JP901.15(M4) OSC700.2(GND) R101.1 R102.1 R201.2 R203.1 R204.2 R205.1 R402.2 R403.2 R501.1 R710.2 R800.1 R801.1 R802.1 R902.2 RN100.1(A1) RN100.2(A2) RN100.3(A3) RN100.4(A4) U100.G7(VSSPST#G7) U100.G8(VSS#G8) U100.G9(VSSPST#G9) U100.G10(VSSPST#G10) U100.G11(VSS#G11) U100.G12(VSSQ#G12) U100.G13(VSSQ#G13) U100.G14(VSSQ#G14) U100.H6(VSS#H6) U100.H7(VSS#H7) U100.H8(VSSPST#H8) U100.H9(VSS#H9) U100.H10(VSS#H10) U100.H11(VSS#H11) U100.H12(VSSQ#H12) U100.H13(VSSQ#H13) U100.H14(VSSQ#H14) U100.J7(VSSPST#J7) U100.J8(VSSPST#J8) U100.J9(VSS#J9) U100.J10(VSS#J10) U100.J11(VSS#J11) U100.J12(VSSQ#J12) U100.J14(VSSQ#J14) U100.K8(VSSPST#K8) U100.K9(VSS#K9) U100.K10(VSS#K10) U100.K11(VSS#K11) U100.K12(VSSQ#K12) U100.K14(VSSQ#K14) U100.L7(VSSPST#L7) U100.L8(VSSPST#L8) U100.L9(VSS#L9) U100.L10(VSS#L10) U100.L11(VSS#L11) U100.L12(VSSQ#L12) U100.L14(VSSQ#L14) U100.M7(VSSPST#M7) U100.M8(VSSPST#M8) U100.M9(VSSPST#M9) U100.M10(VSSPST#M10) U100.M11(VSS#M11) U100.M12(VSSQ#M12) U100.M13(VSSQ#M13) U100.M14(VSSQ#M14) U100.N10(VSSPST#N10) U100.N11(VSS#N11) U100.N12(VSS#N12) U100.N13(VSSQ#N13) U100.N15(VSS3_RTC) U100.P7(VSS#P7) U100.P8(VSS#P8) U100.P9(VSSPST#P9) U100.P10(VSS#P10) U100.P11(VSS#P11) U100.P12(VSS#P12) U100.P13(VSSQ#P13) U100.P15(CLK32K_AVSS) U100.R16(MPLL_VSS3) U100.R17(CLK32K_VSS3) U100.T16(DPLL_VSS3) U100.T17(MPLL_AVSS) U100.U16(APLL_DVSS) U100.U19(MPLL_DVSS) U100.V17(APLL_AVSS) U100.V19(DPLL_AVSS) U100.W13(VSSPST_PMU) U100.W15(VSS_PMU) U100.W19(DPLL_DVSS) U100.Y20(APLL_VSS3) U201.1(GND) U400.2 U400.4 U401.25(GND) U402.8(GND) U500.A3(VSS#A3) U500.A7(VSSQ#A7) U500.B2(VSSQ#B2) U500.B8(VSSQ#B8) U500.D2(VSSQ#D2) U500.D8(VSSQ#D8) U500.E3(VSS#E3) U500.E7(VSSQ#E7) U500.F2(VSSQ#F2) U500.F8(VSSQ#F8) U500.H2(VSSQ#H2) U500.H8(VSSQ#H8) U500.J3(VSS#J3) U500.J7(VSSDL) U500.N1(VSS#N1) U500.P9(VSS#P9) U700.12(DGND) U700.33(GNDPADDLE) U800.1(GND) U801.9(GND12A) U801.21(VSSIO) U801.26(VSS) U801.32(GND12D) U801.33(GNDA) U900.1(GND) U901.1(GND) U902.2(GND) Y800.2 Y800.4 ZD900.1(ANODE)
GND_SIGNAL: C702.2 C706.1 C707.1 C708.1 C709.1 C710.1 C713.2 C717.1 FB702.1 JP700.1 JP701.1 R702.2 R703.1 R706.2 R707.2 U700.24(SPKGND) U700.28(AGND)
VBUS: C408.1 FB402.1 JP400.1(VBUS) R401.2
VDD1.2V: C309.2 C310.2 C311.2 C312.2 C313.2 C314.1 C315.2 C318.2 C319.2 C320.2 C321.2 C322.2 C333.1 C334.1 C335.2 C907.1 C908.2 FB900.1 L900.2 U100.D5(VDD#D5) U100.E6(VDD#E6) U100.E7(VDD#E7) U100.E8(VDD#E8) U100.E9(VDD#E9) U100.E10(VDD#E10) U100.E11(VDD#E11) U100.E12(VDD#E12) U100.E13(VDD#E13) U100.E14(VDD#E14) U100.E16(VDD#E16) U100.F7(VDD#F7) U100.G5(VDD#G5) U100.G6(VDD#G6) U100.G17(VDD#G17) U100.H5(VDD#H5) U100.H16(VDD#H16) U100.J5(VDD#J5) U100.K5(VDD_ARM#K5) U100.K7(VDD#K7) U100.K16(VDD#K16) U100.L5(VDD_ARM#L5) U100.M5(VDD_ARM#M5) U100.N5(VDD_ARM#N5) U100.N6(VDD_ARM#N6) U100.N7(VDD_ARM#N7) U100.N14(VDDPST_RTC) U100.P5(VDD_ARM#P5) U100.P6(VDD_ARM#P6) U100.R6(VDD_ARM#R6) U100.R7(VDD#R7) U100.R8(VDD#R8) U100.R18(VDD_RTC) U100.T6(VDD_ARM#T6) U100.T10(VDD#T10) U100.T13(VDD_PMU) U902.5(VOUT)
VDD3.3V: C202.1 C307.1 C308.1 C326.2 C327.2 C328.2 C329.2 C330.2 C331.2 C332.2 C336.1 C337.2 C700.2 C703.2 C800.2 C905.2 C906.2 FB20.2 FB401.2 FB700.1 FB800.2 J600.15 JP600.1 JP600.3 OSC700.4(VDD) R202.2 R700.1 R901.1 U100.F6(VDDPST#F6) U100.F8(VDDPST#F8) U100.F9(VDDPST#F9) U100.F10(VDDPST#F10) U100.F11(VDDPST#F11) U100.J6(VDDPST#J6) U100.K6(VDDPST#K6) U100.L6(VDDPST#L6) U100.M6(VDDPST#M6) U100.N8(VDDPST#N8) U100.N9(VDDPST#N9) U100.P16(CLK32K_AVDD) U100.R9(VDDPST#R9) U100.R10(VDDPST#R10) U100.R11(VDDPST#R11) U100.R15(MPLL_VDDPOC) U100.T11(VDDPST#T11) U100.T18(CLK32K_VDD) U100.U17(DPLL_VDDPOC) U100.U20(CLK32K_VDDPOC) U100.V13(VDDPST_PMU) U100.W17(APLL_VDDPOC) U201.3(VCC) U800.3(VIN) U901.3(VIN) U902.1(RUN) U902.4(VIN)
VDD5V: C410.2 C900.2 C901.2 C902.1 C903.1 F900.2 FB400.2 FB402.2 JP600.2 JP600.4 R900.1 U402.19(VCC) U900.3(VIN) ZD900.2(CATHODE)
VDD_AUDIO: C701.2 C704.2 C705.2 FB700.2 FB701.1 R708.1 U700.13(DCVDD) U700.14(DBVDD)
VDD_DDR: C100.1 C101.1 C300.1 C301.2 C302.2 C303.2 C304.2 C305.2 C306.2 C502.1 C503.1 C504.1 C505.1 C506.1 C507.1 C508.1 C509.1 C510.1 C511.1 C512.1 C910.1 C911.2 R100.2 R500.2 U100.D15(VDDQ#D15) U100.E15(VDDQ#E15) U100.F12(VDDQ#F12) U100.F13(VDDQ#F13) U100.F14(VDDQ#F14) U100.F15(VDDQ#F15) U100.G15(VDDQ#G15) U100.G16(VDDQ#G16) U100.H15(VDDQ#H15) U100.J13(VDDQ#J13) U100.J15(VDDQ#J15) U100.J16(DDR/VDDQ_AON) U100.K13(VDDQ#K13) U100.K15(VDDQ#K15) U100.L13(VDDQ#L13) U100.L15(VDDQ#L15) U500.A1(VDD#A1) U500.A9(VDDQ#A9) U500.C1(VDDQ#C1) U500.C3(VDDQ#C3) U500.C7(VDDQ#C7) U500.C9(VDDQ#C9) U500.E1(VDD#E1) U500.E9(VDDQ#E9) U500.G1(VDDQ#G1) U500.G3(VDDQ#G3) U500.G7(VDDQ#G7) U500.G9(VDDQ#G9) U500.J1(VDDL) U500.J9(VDD#J9) U500.M9(VDD#M9) U500.R1(VDD#R1) U901.2(VOUT)
VDD_DDR_REF: C500.1 C501.1 R500.1 R501.2 TP502.1(TP) U500.J2(VREF)
VDD_ETH1.2V: C804.1 C805.2 C806.2 C807.2 C808.2 C809.1 C810.2 U800.2(VOUT) U801.1(VCC) U801.6(VCC12A) U801.27(VDD)
VDD_ETH3.3V: C801.1 C802.2 C803.2 FB800.1 R805.1 R808.2 R809.2 R810.1 U801.3(VCC33A_BG) U801.22(VDDIO)
VDD_IN: F900.1 JP401.1(VBUS) JP900.1(VBUS)
VDD_SD: C914.1 C915.2 FB20.1 JP901.4(VDD) R903.2 R904.2 R905.2 R906.2 R907.2 R909.2 R910.2
VDDA_AUDIO: C702.1 C706.2 C707.2 FB701.2 U700.26(SPKVDD) U700.31(AVDD)
VDDPLL1.2V: C316.1 C317.1 C323.1 C324.1 C325.1 C909.1 C912.2 FB900.2 U100.P14(MPLL_AVDD) U100.R14(APLL_AVDD) U100.T15(DPLL_VDD) U100.U18(MPLL_VDD) U100.V18(DPLL_AVDD) U100.V20(MPLL_DVDD) U100.W18(APLL_VDD) U100.W20(DPLL_DVDD) U100.Y19(APLL_DVDD)
25M_IN: C815.1 R811.1 U801.23(PAD_XTAL_P) Y800.3
25M_OUT: C814.1 R811.2 U801.24(PAD_XTAL_N) Y800.1
AP0_INT0: JP600.13 U100.Y15(AP0/INT0)
AP1_INT1: JP600.15 U100.V14(AP1/INT1)
AP2_INT2: JP600.17 U100.U13(AP2/INT2)
AP3_INT3: J600.4 U100.W14(AP3/INT3)
AUDIO_CLK_12M: OSC700.3(OUT) U700.11(MCLK)
BTMD0: R204.1 U100.Y13(BOOTMODE0)
BTMD1: R203.2 U100.Y14(BOOTMODE1)
BTMD2: R202.1 U100.V12(BOOTMODE2)
CLK12M_XIN: C200.1 R200.1 U100.Y17(CLK12M_XIN) Y200.2
CLK12M_XOUT: C201.1 R200.2 U100.Y18(CLK12M_XOUT) Y200.1
CPU_DDR_REF: C102.1 C103.1 C104.1 R100.1 R101.2 U100.C15(VREF0) U100.E19(VREF1) U100.M18(VREF2)
CTS4: JP600.12 U100.D9(PD0/URAT4_CTS)
DDR_BA0: U100.C19(DDR2_BA0) U500.L2(BA0)
DDR_BA1: U100.E17(DDR2_BA1) U500.L3(BA1)
DDR_BA2: U100.D19(DDR2_BA2) U500.L1(BA2)
DDR_CK: TP505.1(TP) U100.D20(DDR2_CK) U500.J8(CK)
DDR_CKE: TP503.1(TP) U100.C20(DDR2_CKE) U500.K2(CKE)
DDR_DM0: U100.B12(DDR2_DM0) U500.F3(LDM)
DDR_DM1: U100.D14(DDR2_DM1) U500.B3(UDM)
DDR_DQS0: TP500.1(TP) U100.A14(DDR2_DQS0) U500.F7(LDQS)
DDR_DQS1: U100.A18(DDR2_DQS1) U500.B7(UDQS)
DDR_DQS2: RN100.7(B2) U100.L20(DDR2_DQS2)
DDR_DQS3: RN100.5(B4) U100.P20(DDR2_DQS3)
DDR_DQS_B_0: TP501.1(TP) U100.A13(DDR2_DQS_B0) U500.E8(L\D\Q\S\/NU)
DDR_DQS_B_1: U100.A17(DDR2_DQS_B1) U500.A8(U\D\Q\S\/NU)
DDR_DQS_B_2: RN100.8(B1) U100.K20(DDR2_DQS_B2)
DDR_DQS_B_3: RN100.6(B3) U100.N20(DDR2_DQS_B3)
DDR_NCAS: U100.E18(DDR2_CAS_B) U500.L7(C\A\S\)
DDR_NCK: TP504.1(TP) U100.E20(DDR2_CK_B) U500.K8(C\K\)
DDR_NCS: U100.F18(DDR2_CS_B) U500.L8(C\S\)
DDR_NRAS: U100.F19(DDR2_RAS_B) U500.K7(R\A\S\)
DDR_NWE: U100.G19(DDR2_WE_B) U500.K3(W\E\)
DDR_ODT: U100.J17(DDR2_ODT) U500.K9(ODT)
ETH_INT5: U100.U2(PI5/INT5) U801.25(PAD_SPI_INTR)
ETH_RXN: JP800.6(P6) R806.1 U801.5(RXIN)
ETH_RXP: JP800.3(P3) R807.1 U801.4(RXIP)
ETH_TXN: JP800.2(P2) R804.2 U801.8(TXON)
ETH_TXP: JP800.1(P1) R803.2 U801.7(TXOP)
HP_L: JP700.3 R705.1 R706.1
HP_R: JP700.2 R703.2 R704.1
I2S_CLK: TP701.1(TP) U100.W1(PC3/I2S_CLK) U700.8(BCLK)
I2S_SDI0: TP703.1(TP) U100.R5(PC0/I2S_SDI0) U700.9(ADCDAT)
I2S_SDO0: TP702.1(TP) U100.T4(PC1/I2S_SDO0) U700.10(DACDAT)
I2S_WS: TP700.1(TP) U100.U3(PC2/I2S_WS) U700.7(LRC)
LCD_CLK: J600.13 U100.Y5(LCDC_PCLK)
LCD_CONTRAST: J600.11 U100.U7(PF0/LCD_CONTRAST)
LCD_DEN: J600.9 U100.W6(PF1/LCD_DEN)
LCD_HSYNC: J600.5 U100.Y6(PF3/LCD_HSYNC)
LCD_LD0: J600.17 U100.V7(PF5/LCD_LD0)
LCD_LD1: J600.18 U100.W7(PF6/LCD_LD1)
LCD_LD2: J600.19 U100.U8(PF7/LCD_LD2)
LCD_LD3: J600.20 U100.Y7(PF8/LCD_LD3)
LCD_LD4: J600.21 U100.V8(PF9/LCD_LD4)
LCD_LD5: J600.22 U100.W8(PF10/LCD_LD5)
LCD_LD6: J600.23 U100.Y8(PF11/LCD_LD6)
LCD_LD7: J600.24 U100.U9(PF12/LCD_LD7)
LCD_LD8: J600.25 U100.V9(PF13/LCD_LD8)
LCD_LD9: J600.26 U100.W9(PF14/LCD_LD9)
LCD_LD10: J600.27 U100.Y9(PF15/LCD_LD10)
LCD_LD11: J600.28 U100.T7(PF16/LCD_LD11)
LCD_LD12: J600.29 U100.U10(PF17/LCD_LD12)
LCD_LD13: J600.30 U100.V10(PF18/LCD_LD13)
LCD_LD14: J600.31 U100.W10(PF19/LCD_LD14)
LCD_LD15: J600.32 U100.Y10(PF20/LCD_LD15)
LCD_LD16: J600.33 U100.Y11(PF21/LCD_LD16)
LCD_LD17: J600.34 U100.W11(PF22/LCD_LD17)
LCD_LD18: J600.35 U100.V11(PF23/LCD_LD18)
LCD_LD19: J600.36 U100.U11(PF24/LCD_LD19)
LCD_LD20: J600.37 U100.T8(PF25/LCD_LD20)
LCD_LD21: J600.38 U100.T9(PF26/LCD_LD21)
LCD_LD22: J600.39 U100.Y12(PF27/LCD_LD22)
LCD_LD23: J600.40 U100.W12(PF28/LCD_LD23)
LCD_VSYNC: J600.7 U100.V6(PF2/LCD_VSYNC)
LED1: JP800.10 U801.14(PAD_LED0)
LED2: JP800.11 U801.15(PAD_LED1)
MICBIAS: C709.2 R701.2 U700.32(MICBIAS)
NRESET: R201.1 U100.R19(NRESET) U201.2(R\E\S\E\T\)
PWM0: J600.3 U100.B2(PE4/PWM0/ND_M0)
PWM1: JP600.18 U100.C3(PE5/PWM1/ND_M1)
PZQ: R102.2 U100.D17(PZQ)
RTS4: JP600.11 U100.A8(PD1/URAT4_RTS)
RXD1: R404.2 U100.A4(PD10/URAT1_RXD)
RXD2: JP600.7 U100.A5(PD8/URAT2_RXD)
RXD3: JP600.6 U100.D7(PD6/URAT3_RXD)
RXD4: JP600.9 U100.B8(PD2/URAT4_RXD)
SCL1: J600.8 U100.V1(PE21/I2C1_CLK)
SCL2: R709.1 U100.T3(PE19/I2C2_CLK)
SCL3: JP600.16 U100.G4(PE17/I2C3_CLK)
SD1_CD#: JP901.10(CD_SW) R910.1
SD1_CLK: R911.1 U100.A1(PD18/SD1_CLK)
SD1_CMD: JP901.2(CMD) R903.1 U100.C4(PD17/SD1_CMD)
SD1_DATA0: JP901.7(DATA0) R904.1 U100.B4(PD13/SD1_DATA0)
SD1_DATA1: JP901.8(DATA1) R905.1 U100.A3(PD14/SD1_DATA1)
SD1_DATA2: JP901.9(DATA2) R906.1 U100.A2(PD15/SD1_DATA2)
SD1_DATA3: JP901.1(CD/DATA3) R902.1 R907.1 U100.B3(PD16/SD1_DATA3)
SD1_WP: JP901.11(WP) R909.1 U100.C5(PD12/SD1_WP)
SDA1: J600.6 U100.R4(PE20/I2C1_DAT)
SDA2: R711.1 U100.U1(PE18/I2C2_DAT)
SDA3: JP600.14 U100.F4(PE16/I2C3_DAT)
SSI1_CLK: J600.12 U100.F5(PE15/SSI1_CLK)
SSI1_CS: J600.10 U100.E5(PE14/SSI1_CS)
SSI1_RXD: J600.14 U100.E4(PE12/SSI1_RXD)
SSI1_TXD: J600.16 U100.C2(PE13/SSI1_TXD)
SSI2_CLK: TP802.1(TP) U100.C1(PE11/SSI2_CLK) U801.19(PAD_SPI_SCK)
SSI2_CS: TP803.1(TP) U100.D3(PE10/SSI2_CS) U801.20(PAD_SPI_CSN)
SSI2_RXD: TP800.1(TP) U100.D4(PE8/SSI2_RXD) U801.17(PAD_SPI_MISO)
SSI2_TXD: TP801.1(TP) U100.B1(PE9/SSI2_TXD) U801.18(PAD_SPI_MOSI)
T_DDR_A0: U100.G18(DDR2_A0) U500.M8(A0)
T_DDR_A1: U100.H20(DDR2_A1) U500.M3(A1)
T_DDR_A2: U100.J18(DDR2_A2) U500.M7(A2)
T_DDR_A3: U100.A20(DDR2_A3) U500.N2(A3)
T_DDR_A4: U100.F20(DDR2_A4) U500.N8(A4)
T_DDR_A5: U100.B20(DDR2_A5) U500.N3(A5)
T_DDR_A6: U100.J19(DDR2_A6) U500.N7(A6)
T_DDR_A7: U100.D18(DDR2_A7) U500.P2(A7)
T_DDR_A8: U100.H17(DDR2_A8) U500.P8(A8)
T_DDR_A9: U100.F16(DDR2_A9) U500.P3(A9)
T_DDR_A10: U100.B19(DDR2_A10) U500.M2(A10)
T_DDR_A11: U100.H18(DDR2_A11) U500.P7(A11)
T_DDR_A12: U100.C18(DDR2_A12) U500.R2(A12)
T_DDR_A13: U100.H19(DDR2_A13) U500.R8(A13)
T_DDR_A14: U100.G20(DDR2_A14) U500.R3(A14)
T_DDR_DQ0: U100.D12(DDR2_DQ0) U500.G8(DQ0)
T_DDR_DQ1: U100.D13(DDR2_DQ1) U500.G2(DQ1)
T_DDR_DQ2: U100.C13(DDR2_DQ2) U500.H7(DQ2)
T_DDR_DQ3: U100.C14(DDR2_DQ3) U500.H3(DQ3)
T_DDR_DQ4: U100.A15(DDR2_DQ4) U500.H1(DQ4)
T_DDR_DQ5: U100.C12(DDR2_DQ5) U500.H9(DQ5)
T_DDR_DQ6: U100.B14(DDR2_DQ6) U500.F1(DQ6)
T_DDR_DQ7: U100.B13(DDR2_DQ7) U500.F9(DQ7)
T_DDR_DQ8: U100.A16(DDR2_DQ8) U500.C8(DQ8)
T_DDR_DQ9: U100.B17(DDR2_DQ9) U500.C2(DQ9)
T_DDR_DQ10: U100.C16(DDR2_DQ10) U500.D7(DQ10)
T_DDR_DQ11: U100.C17(DDR2_DQ11) U500.D3(DQ11)
T_DDR_DQ12: U100.B18(DDR2_DQ12) U500.D1(DQ12)
T_DDR_DQ13: U100.B15(DDR2_DQ13) U500.D9(DQ13)
T_DDR_DQ14: U100.D16(DDR2_DQ14) U500.B1(DQ14)
T_DDR_DQ15: U100.B16(DDR2_DQ15) U500.B9(DQ15)
TXD1: R405.2 U100.D6(PD11/URAT1_TXD)
TXD2: JP600.5 U100.B5(PD9/URAT2_TXD)
TXD3: JP600.8 U100.C6(PD7/URAT3_TXD)
TXD4: JP600.10 U100.A6(PD3/URAT4_TXD)
ULPI_D0: U100.V2(ULPI_DATA0) U401.4(DATA0)
ULPI_D1: U100.V3(ULPI_DATA1) U401.5(DATA1)
ULPI_D2: U100.W2(ULPI_DATA2) U401.6(DATA2)
ULPI_D3: U100.Y2(ULPT_DATA3) U401.7(DATA3)
ULPI_D4: U100.W3(ULPI_DATA4) U401.8(DATA4)
ULPI_D5: U100.V4(ULPI_DATA5) U401.10(DATA5)
ULPI_D6: U100.W4(ULPI_DATA6) U401.11(DATA6)
ULPI_D7: TP400.1(TP) U100.Y3(ULPT_DATA7) U401.12(DATA7)
ULPI_DIR: TP403.1(TP) U100.V5(ULPI_DIR) U401.1(DIR)
ULPI_NRST/PI4: TP401.1(TP) U100.Y1(PI4/INT4) U401.22(RESETB)
ULPI_NXT: U100.U6(ULPI_NXT) U401.3(NXT)
ULPI_STP: U100.W5(ULPI_STP) U401.24(STP)
ULPI_XCLK: TP402.1(TP) U100.Y4(ULPT_XCLK) U401.2(CLKOUT)
USB_DM: JP400.2(D-) U401.14(DM)
USB_DP: JP400.3(D+) U401.13(DP)
N26803328: TP202.1(TP) U100.T2(PF4/LCD_PCLK)
N26809786: R205.2 U100.V16(CSEL)
N26832635: L900.1 U902.3(SW)
N27174352: FB801.2 JP800.8(P8)
N27174410: JP800.9 R808.1
N27174420: JP800.12 R809.1
N27174538: JP800.4(P4) JP800.5(P5) R805.2
N27176543: R800.2 U801.30(PAD_TEST_EN)
N27176827: C813.1 R810.2 U801.13(PAD_RST_N)
N27176953: R801.2 R802.2 U801.2(RSET_BG)
N27178772: C811.1 R803.1 R804.1
N27179208: C812.2 R806.2 R807.2
N27185589: JP401.2(D-) U402.7(USBD-)
N27185613: JP401.3(D+) U402.6(USBD+)
N27185780: C411.1 U402.9(XI) Y400.2
N27185788: C412.1 U402.10(XO) Y400.1
N27186179: C409.2 U402.5(V3)
N27191219: C403.1 C404.1 FB400.1 U401.16(VBAT)
N27191223: R403.1 U401.19(RBIAS)
N27191276: R401.1 U401.17(VBUS)
N27191350: C401.1 C402.1 FB401.1 U401.9(VDDIO)
N27191358: C405.1 U401.15(VDD3V3)
N27191378: C406.1 U401.23(VDD1V8)
N27191471: R402.1 U401.18(ID)
N27191473: C400.1 R400.1 U400.1 U401.20(XO)
N27191475: C407.1 R400.2 U400.3 U401.21(REFCLK/XI)
N27225679: D900.1(ANODE) R900.2
N27228406: C712.2 R705.2
N27228432: C711.2 R704.2
N27228482: C712.1 U700.30(LOUT1)
N27228484: C711.1 U700.29(ROUT1)
N27228647: R708.2 R710.1 U700.18(MODE)
N27228664: C708.2 U700.27(VMID)
N27228921: R709.2 U700.16(SCLK)
N27228923: R711.2 U700.17(SDIN)
N27228957: C714.1 U700.1(LIP)
N27238033: C904.1 R901.2 U900.2(VOUT)
N27242891: C710.2 C713.1 C714.2 C715.2 JP701.3 R701.1 R702.1
N27242966: C715.1 C716.2 C717.2 JP701.2 R707.1
N27243114: C716.1 U700.2(LIN)
N27243702: OSC700.1(OE) R700.2
N27260459: TP201.1(TP) U100.U15(WAKEUP)
N27261552: TP200.1(TP) U100.P17(RTC_POWERUP)
N27295098: JP901.5(CLK) R911.2
N27324037: R405.1 U402.4(RXD)
N27324042: R404.1 U402.3(TXD)

Pads without a net: FD503 1; FD700 1; FD701 1; FD702 1; JP401 4; JP700 4 5; JP701 4 5; JP800 7 15 16; JP900 2 3 4; NOREF 1; NOREF#2 1; U100 A7 A9 A10 A11 A12 A19 B6 B7 B9 B10 B11 C7 C8 C9 C10 C11 D1 D2 D8 D10 D11 E1 E2 E3 F1 F2 F3 F17 G1 G2 G3 H1 H2 H3 H4 J1 J2 J3 J4 J20 K1 K2 K3 K4 K17 K18 K19 L1 L2 L3 L4 L16 L17 L18 L19 M1 M2 M3 M4 M15 M16 M17 M19 M20 N1 N2 N3 N4 N16 N17 N18 N19 P1 P2 P3 P4 P18 P19 R1 R2 R3 R12 R13 R20 T1 T5 T12 T14 T19 T20 U4 U5 U12 U14 V15 W16 Y16; U402 1 2 11 12 13 14 15 16 17 18 20; U500 A2 E2 R7; U700 3 4 5 6 15 19 20 21 22 23 25; U801 10 11 12 16 28 29 31

## Via types
v1: diameter 0.41, hole 0.2, TOP to BOTTOM, 419 vias
v2: diameter 0.51, hole 0.25, TOP to BOTTOM, 363 vias

## Routing (per net, layer and track width the routed paths; a pad name or vN(x,y) marks a point on that pad's centre or on a via; arc(x,y) is an arc through that point)
GND: length 463.4
  TOP w0.254: U500.H2 10.03,16.24 v1(10.45,16.65) ; U100.P9 30.37,29.73 v1(30.76,30.12) 31.15,29.73 U100.P8 ; v1(26.79,34.11) 26.79,34.11 U100.W13 ; U500.P9 v1(4.84,10.25) ; v1(9.63,11.04) 9.65,11.04 10.03,11.42 U500.H8 ; U500.B2 v1(15.23,16.64) ; U100.L14 v1(25.98,27.73) 26.37,28.12 U100.M14 ; U500.D8 v1(13.63,11.04) ; v1(11.93,12.68) 12.37,12.24 U500.E7 ; U100.G9 30.37,24.13 v1(30.77,24.53) U100.G8 ; v2(52.07,28.56) 52.17,28.66 U700.33 ; v1(32.36,28.52) 31.97,28.13 U100.M7 ; C810.1 57.54,15.56 C805.1 ; U100.P7 v1(32.37,30.13) ; U100.P13 v1(27.57,30.13) U100.P12 ; U100.L10 29.57,27.33 v1(29.17,27.73) U100.L11 v1(28.37,27.73) U100.L12 ; U100.T16 24.77,31.32 v1(24.37,30.92) ; U401.25 52.49,39.78 v2(51.68,40.59) ; U100.H12 27.97,24.93 v1(27.57,25.33) U100.J12 ; v1(6.42,16.66) 6.41,16.66 6.39,16.67 U500.N1 ; U100.P15 25.57,29.73 25.96,29.34 v1(25.97,29.34) U100.N15 ; C200.2 29.66,40.56 v2(30.07,40.14) ; 26.37,24.13 U100.G14 25.96,24.54 v1(25.96,24.54) 26.36,24.93 U100.H14 ; U100.N12 v1(27.57,29.33) ; U100.W19 v1(22.77,33.33) 22.38,32.93 U100.V19 ; v1(12.03,16.64) 11.63,16.24 U500.F2 ; U100.P10 v1(29.17,29.33) 28.77,29.73 U100.P11 ; C201.2 v1(24.41,41.37) ; U500.J7 9.23,12.35 v1(8.83,12.74) ; v1(28.37,25.33) U100.J11 v1(29.17,26.13) U100.J10 29.56,25.73 ; U700.33 51.33,27.82 v2(51.14,27.63) ; U700.33 51.3,26.85 v2(51.13,26.85) ; U700.33 52.29,28.44 U700.12 ; U100.G11 28.77,24.13 29.16,24.52 v1(29.17,24.52) 29.56,24.13 U100.G10 ; U500.B8 v1(15.23,11.04) ; U100.J7 v1(32.37,25.33) 32.77,24.93 U100.H6 32.37,25.33 ; U100.G7 32.36,24.53 v1(32.36,24.54) 31.97,24.93 U100.H7 31.97,24.93 ; U100.H10 v1(29.18,25.33) 28.78,24.93 ; U500.D2 13.58,15.89 13.58,15.89 v1(13.61,15.86) ; U800.1 57.73,21.41 v2(56.97,20.65) ; U100.Y20 v1(21.17,34.93) ; U500.E3 v1(12.04,15.06) ; v1(24.37,30.92) 23.97,31.32 U100.T17 ; v1(24.37,30.92) U100.R17 ; v1(24.37,30.92) U100.R16 ; U100.H13 27.17,24.93 v1(27.57,24.54) ; U100.K8 v1(30.77,26.93) 30.37,26.53 U100.K9 ; U100.H9 30.37,24.93 v1(30.77,25.33) U100.H8 ; U100.L7 v1(31.57,27.73) ; U100.N10 v1(29.17,28.53) 28.77,28.93 U100.N11 ; U100.H11 28.78,24.93 ; 28.78,24.93 28.38,25.33 ; v1(27.57,24.54) 27.57,24.54 27.97,24.14 U100.G12 ; v1(27.57,24.54) U100.G13 ; U100.J14 v1(25.97,26.13) U100.K14 ; U100.M9 v1(30.77,28.53) U100.M8 ; U500.F8 v1(12.03,11.04) ; U801.21 52.29,14 ; 52.29,14 U801.33 54.29,16 U801.9 ; 52.29,14 51.29,13 U801.26 ; U100.J8 v1(30.77,26.13) U100.J9 ; U100.N13 27.17,28.92 v1(27.56,28.52) U100.M13 27.17,28.13 ; U500.A3 v1(16.03,15.84) ; U100.U19 v1(21.97,32.53) ; U100.K12 27.97,26.5 v1(28.36,26.11) 28.77,26.52 U100.K11 v1(29.17,26.93) 29.57,26.53 U100.K10 ; U100.M11 v1(28.37,28.53) U100.M12 ; C803.1 48.16,14.76 47.76,15.15 ; U100.L8 v1(30.77,27.73) U100.L9 ; U100.U16 v1(24.37,32.53) ; D900.2 v1(17.16,47.1) ; U100.M10 v1(29.97,28.53) ; U100.V17 v1(23.57,33.33) ; U500.J3 9.23,15.33 v1(8.91,15.01) ; v1(25.16,34.13) 25.17,34.13 U100.W15 ; U500.A7 v1(15.25,12.61)
  TOP w0.381: C902.2 13.25,46.89 ; C902.2 12.07,44.71 ; C902.2 10.89,46.89 ; C902.2 12.07,49.07 ; 55,42.78 C400.2 ; C400.2 55.43,43.26 ; C400.2 55,43.74 ; C914.2 49.64,6.39 ; C914.2 48.91,7.07 ; C914.2 48.91,5.71 ; C914.2 48.18,6.39 ; D900.2 18.14,48.25 ; D900.2 17.16,49.14 ; D900.2 16.18,48.25 ; 47.28,9.72 C814.2 ; C814.2 47.76,10.15 ; C814.2 46.8,10.15 ; 5.51,48.98 5.51,49.67 ; 5.51,48.98 5.51,48.29 ; 5.51,48.98 4.82,48.98 ; 31.31,4.63 JP600.20 ; JP600.20 33.07,4.63 ; JP600.20 32.19,3.75 ; JP600.20 32.19,5.51 ; 51.3,9.24 C807.1 ; C807.1 51.78,8.81 ; C807.1 52.26,9.24 ; U400.2 52.2,47.72 ; U400.2 51.13,46.78 ; U400.2 50.06,47.72 ; U400.2 51.13,48.66 ; 59.69,13.05 R801.1 ; R801.1 59.69,14.01 ; R801.1 60.11,13.53 ; 2.06,46.93 JP900.6 ; JP900.6 4.66,46.93 ; JP900.6 3.36,48.12 ; JP900.6 3.36,45.73 ; 55.14,44.21 U400.4 ; U400.4 56.21,45.15 ; U400.4 55.14,46.09 ; 5.51,42.36 6.2,42.36 ; 5.51,42.36 5.51,41.67 ; 5.51,42.36 5.51,43.05 ; 5.51,42.36 4.82,42.36 ; C815.2 47.28,15.58 ; C815.2 46.8,15.15 ; C815.2 47.76,15.15 ; 31.31,2.63 JP600.19 ; JP600.19 33.07,2.63 ; JP600.19 32.19,3.51 ; JP600.19 32.19,1.75 ; 60.55,16.13 C809.2 ; C809.2 61.53,17.21 ; C809.2 59.57,17.21 ; C809.2 60.55,18.29 ; 5.51,52.78 5.51,53.47 ; 5.51,52.78 6.2,52.78 ; 5.51,52.78 5.51,52.09 ; 5.51,52.78 4.82,52.78 ; R802.1 60.11,12.52 ; R802.1 59.69,13 ; R802.1 59.69,12.04 ; 55.98,7.82 C801.2 ; C801.2 57.06,8.81 ; C801.2 57.06,6.84 ; C408.2 65.81,42.96 ; C408.2 65.13,42.23 ; C408.2 64.45,42.96 ; C408.2 65.13,43.7 ; JP401.7 4.66,44.41 ; JP401.7 3.36,43.22 ; JP401.7 2.06,44.41 ; JP401.7 3.36,45.61 ; J600.1 58.54,54.66 ; J600.1 58.54,52.9 ; J600.1 59.42,53.78 ; J600.1 57.66,53.78 ; 52.82,9.27 R800.1 ; R800.1 53.3,8.84 ; R800.1 53.78,9.27 ; 29.66,41.33 C200.2 30.09,40.85 ; JP401.5 7.58,41.76 ; JP401.5 5.87,41.76 ; JP401.5 6.72,42.14 ; 18.95,42.1 C410.1 ; C410.1 19.91,42.1 ; C410.1 19.43,41.67 ; 42.56,9.8 Y800.4 ; Y800.4 43.5,10.87 ; Y800.4 42.56,11.94 ; Y800.4 41.62,10.87 ; 58.54,50.9 J600.2 ; J600.2 58.54,52.66 ; J600.2 57.66,51.78 ; J600.2 59.42,51.78 ; JP400.4 68.59,51.32 ; JP400.4 66.92,51.32 ; JP400.4 67.76,50.49 ; JP400.4 67.76,52.15 ; 61.13,19.36 C800.1 ; C800.1 62.49,19.36 ; C800.1 61.81,18.62 ; 3.36,35.32 JP401.6 ; JP401.6 4.66,36.51 ; JP401.6 2.06,36.51 ; 57.54,14.08 C805.1 57.96,14.56 ; 53.8,20.14 C808.1 53.32,19.71 ; 5.51,37.87 5.51,38.56 ; 5.51,38.56 5.51,39.25 ; 5.51,38.56 4.82,38.56 ; R902.2 39.66,4.4 ; R902.2 38.98,3.67 ; R902.2 40.34,3.67 ; JP900.7 4.66,54.83 ; JP900.7 3.36,53.63 ; JP900.7 2.06,54.83 ; 54.54,22.09 C804.2 55.62,21.11 ; C409.1 8.55,42.51 ; C409.1 9.03,42.09 ; C409.1 8.07,42.09 ; 57.54,11.97 C806.1 57.96,12.45 ; 50.79,20.22 C813.2 ; C813.2 51.47,20.95 ; C813.2 50.79,21.68 ; C813.2 50.11,20.95 ; 49.77,43.27 C407.2 50.19,43.75 ; 57.95,13.53 C802.1 57.53,14.01 ; Y800.2 46.07,14.88 ; Y800.2 44.19,14.88 ; Y800.2 45.13,15.95 ; 54.29,11.34 U801.32 54.6,11.85 ; 8.18,35.17 C411.2 ; C411.2 8.18,36.13 ; C411.2 7.75,35.65 ; 23.98,40.85 C201.2 24.41,40.37 ; 47.18,23.47 OSC700.2 ; OSC700.2 48.38,24.77 ; OSC700.2 47.18,26.07 ; C412.2 11.27,36.13 ; C412.2 11.27,35.17 ; C412.2 11.69,35.65 ; C915.1 48.62,7.73 ; C915.1 48.2,8.21 ; C915.1 48.2,7.25 ; 5.87,52.18 JP900.5 ; JP900.5 7.58,52.18 ; JP900.5 6.72,52.56 ; 9.35,39.18 U402.8 11.36,39.18
  TOP w0.508: R902.2 v2(39.66,2.76)
  GND w0.381: 4.82,52.78 5.51,52.78 ; 5.51,52.78 5.51,53.47 ; 5.51,52.78 6.2,52.78 ; 5.51,52.78 5.51,52.09 ; 57.66,51.78 J600.2 ; J600.2 58.54,52.66 ; J600.2 59.42,51.78 ; J600.2 58.54,50.9 ; 66.92,51.32 JP400.4 ; JP400.4 67.76,50.49 ; JP400.4 68.59,51.32 ; JP400.4 67.76,52.15 ; 4.82,38.56 5.51,38.56 ; 5.51,38.56 5.51,39.25 ; 5.51,38.56 5.51,37.87 ; 5.51,42.36 6.2,42.36 ; 5.51,42.36 5.51,43.05 ; 5.51,42.36 5.51,41.67 ; 5.51,42.36 4.82,42.36 ; 5.51,48.98 6.2,48.98 ; 5.51,48.98 5.51,49.67 ; 5.51,48.98 4.82,48.98 ; 5.51,48.98 5.51,48.29 ; 32.19,1.75 JP600.19 ; JP600.19 31.31,2.63 ; JP600.19 33.07,2.63 ; JP600.19 32.19,3.51 ; J600.1 58.54,54.66 ; J600.1 58.54,52.9 ; J600.1 57.66,53.78 ; J600.1 59.42,53.78 ; 31.31,4.63 JP600.20 ; JP600.20 32.19,3.75 ; JP600.20 33.07,4.63 ; JP600.20 32.19,5.51
  GND1 w0.381: 4.82,42.36 5.51,42.36 ; 5.51,42.36 5.51,43.05 ; 5.51,42.36 6.2,42.36 ; 5.51,42.36 5.51,41.67 ; J600.1 59.42,53.78 ; J600.1 57.66,53.78 ; J600.1 58.54,54.66 ; J600.1 58.54,52.9 ; JP600.19 33.07,2.63 ; JP600.19 31.31,2.63 ; JP600.19 32.19,1.75 ; JP600.19 32.19,3.51 ; JP400.4 67.76,52.15 ; JP400.4 66.92,51.32 ; JP400.4 68.59,51.32 ; JP400.4 67.76,50.49 ; 5.51,48.98 5.51,49.67 ; 5.51,48.98 5.51,48.29 ; 5.51,48.98 4.82,48.98 ; 5.51,48.98 6.2,48.98 ; J600.2 58.54,52.66 ; J600.2 59.42,51.78 ; J600.2 57.66,51.78 ; J600.2 58.54,50.9 ; 5.51,37.87 5.51,38.56 ; 5.51,38.56 5.51,39.25 ; 5.51,38.56 4.82,38.56 ; JP600.20 32.19,5.51 ; JP600.20 31.31,4.63 ; JP600.20 33.07,4.63 ; JP600.20 32.19,3.75 ; 5.51,52.09 5.51,52.78 ; 5.51,52.78 6.2,52.78 ; 5.51,52.78 5.51,53.47 ; 5.51,52.78 4.82,52.78
  BOTTOM w0.254: v1(29.18,31.71) 29.11,31.65 C332.1 ; v1(31.57,25.33) 31.58,25.32 ; 31.58,25.32 C327.1 ; 31.58,25.32 31.58,25.33 31.57,25.33 ; C324.2 21.98,33.12 22.57,33.12 v1(22.77,33.33) ; v1(34.76,25.32) 34.83,25.39 C318.1 ; R204.2 R203.1 22.57,37.66 R205.1 v1(21.98,37.65) ; C301.1 27.13,24.9 v1(27.57,25.33) ; C326.1 v1(29.97,25.33) ; C103.2 21.12,22.9 v1(21.12,22.9) ; 25.18,25.87 C303.1 ; 57.72,40.75 57.68,40.72 C404.2 ; v1(33.99,30.14) 34.11,30.26 C312.1 ; v1(13.61,15.86) 13.54,15.92 C510.2 ; v1(28.37,25.33) 28.4,25.3 ; 28.4,25.3 C305.1 ; 28.4,25.3 28.4,25.31 28.38,25.33 ; C304.1 25.2,27.95 25.75,27.95 v1(25.98,27.73) ; v1(22.77,28.52) 22.61,28.68 C102.2 ; v2(2.43,12.31) 2.42,12.31 1.53,13.2 C300.2 ; C703.1 42.76,27.63 42.67,27.54 v1(42.67,27.52) ; v1(29.97,28.53) 29.99,28.56 C313.1 ; v1(30.8,21.36) 30.81,21.36 31.24,21.79 C310.1 ; v1(32.36,28.52) 32.58,28.3 C331.1 ; v1(16.03,15.84) 16.13,15.95 C509.2 ; C912.1 18.89,34.66 ; C320.1 33.26,23.72 v1(33.95,23.72) 34.63,23.72 C311.1 ; v1(24.35,27.72) 24.12,27.95 C319.1 ; 28.36,28.54 v1(28.37,28.53) ; C309.1 14.71,28.41 14.93,28.63 14.94,28.63 v2(15.3,28.99) 15.67,28.63 15.67,28.62 15.88,28.41 C334.2 ; C307.2 23.91,30.91 24.36,30.91 v1(24.37,30.92) 25.07,31.63 C333.2 25.07,31.81 24.69,32.19 24.69,32.21 v1(24.37,32.53) ; C508.2 v2(16.2,7.75) ; v1(25.97,29.34) 25.69,29.62 25.69,29.76 25.61,29.84 25.54,29.91 25.35,29.91 C335.1 ; C314.2 v2(38.07,24.97) ; v1(25.96,24.54) 25.64,24.22 25.64,24.11 25.26,23.73 C101.2 ; v2(18.51,30.6) RN100.4 RN100.3 RN100.2 RN100.1 ; v1(27.57,24.54) 26.85,23.81 26.85,23.72 C306.1 ; C337.1 21.12,30.91 v1(21.16,30.95) 21.2,30.9 C317.2 ; C302.1 27.47,28.61 v1(27.56,28.52) ; C511.2 8.76,15.16 v1(8.91,15.01) ; v1(29.16,21.34) 28.72,21.77 28.38,21.77 C321.1 ; C500.2 9.62,11.03 v1(9.63,11.04) ; C322.1 23.57,23.65 v1(23.57,22.93) ; U901.1 v2(32.23,9.1) ; C315.1 33.13,30.41 ; C316.2 20.49,34.7 ; v1(32.37,25.33) 32.59,25.11 C330.1 33.14,25.1 32.6,25.1 32.37,25.33 ; 31.65,30.13 C329.1 ; v2(4.84,34.96) U902.2
  BOTTOM w0.381: 28.88,24.82 C305.1 27.92,24.82 ; 8.85,28.23 R201.2 9.27,27.75 ; 25.66,25.86 C303.1 24.7,25.86 ; C202.2 2.68,26.91 ; C202.2 1.31,26.91 ; C202.2 1.99,27.64 ; C202.2 1.99,26.18 ; 67.76,50.49 JP400.4 ; JP400.4 68.59,51.32 ; JP400.4 66.92,51.32 ; JP400.4 67.76,52.15 ; 58.54,52.9 J600.1 ; J600.1 59.42,53.78 ; J600.1 57.66,53.78 ; J600.1 58.54,54.66 ; 32.06,24.82 C327.1 31.1,24.82 ; JP901.13 60.94,3.05 ; JP901.13 60.01,1.62 ; JP901.13 61.87,1.62 ; 18.51,27.85 RN100.1 18.03,28.22 ; 8.13,35.78 C907.2 ; C907.2 8.13,37.74 ; C907.2 9.21,36.76 ; C907.2 7.05,36.76 ; 62.41,1.99 C811.2 ; C811.2 63.09,1.26 ; C811.2 63.78,1.99 ; C811.2 63.09,2.73 ; 38.03,26.28 C336.2 ; C336.2 39.39,26.28 ; C336.2 38.71,27.01 ; C336.2 38.71,25.55 ; 5.4,26.42 U201.1 ; U201.1 6.76,26.42 ; U201.1 6.08,25.54 ; 0.84,20.24 C100.2 ; C100.2 1.53,20.97 ; C100.2 1.53,19.51 ; 5.51,52.09 5.51,52.78 ; 5.51,52.78 4.82,52.78 ; 5.51,52.78 5.51,53.47 ; C315.1 33.61,30.41 ; C315.1 32.65,30.41 ; C315.1 33.13,30.84 ; 53.21,44.21 R403.2 ; R403.2 54.17,44.21 ; R403.2 53.69,44.64 ; C502.2 30.21,20.24 ; C502.2 31.29,19.26 ; C502.2 29.13,19.26 ; C502.2 30.21,18.28 ; 9.71,35.22 C908.1 ; C908.1 10.67,35.22 ; C908.1 10.19,35.64 ; 57.31,41.99 C403.2 ; C403.2 58.77,41.99 ; C403.2 58.04,41.31 ; C403.2 58.04,42.67 ; 51.05,45.25 C406.2 ; C406.2 51.73,44.52 ; C406.2 52.41,45.25 ; C406.2 51.73,45.98 ; 12.88,8.22 C506.2 ; C506.2 13.36,8.64 ; C506.2 12.4,8.64 ; R402.2 54.72,44.63 ; R402.2 55.2,44.2 ; R402.2 54.24,44.2 ; 15.53,34.7 C909.2 ; C909.2 14.45,35.68 ; C909.2 15.53,36.66 ; C909.2 16.61,35.68 ; 8.65,38.85 U900.1 ; U900.1 8.65,40.11 ; U900.1 9.73,39.48 ; 9.4,8.64 R501.1 8.92,8.21 ; 58.04,38.77 C405.2 ; C405.2 58.77,39.45 ; C405.2 58.04,40.13 ; C405.2 57.31,39.45 ; 11.47,45.99 C903.2 12.45,47.07 ; 27.87,29.13 C328.1 ; C328.1 28.84,29.13 ; C328.1 28.36,28.7 ; C812.1 62.9,14.94 ; C812.1 62.42,14.52 ; C812.1 63.38,14.52 ; 31.11,30.08 C329.1 32.07,30.08 ; C701.1 51.7,31.04 ; C701.1 51.28,30.56 ; C701.1 51.7,30.08 ; C402.2 53.2,36.74 ; C402.2 53.2,35.78 ; C402.2 53.62,36.26 ; 5.83,8.22 C505.2 ; C505.2 5.34,8.64 ; C505.2 6.31,8.64 ; 52.36,18.72 JP901.6 ; JP901.6 52.99,17.29 ; JP901.6 53.62,18.72 ; 26.8,24.47 C301.1 26.32,24.9 ; 46.03,28.46 C704.1 ; C704.1 47.49,28.46 ; C704.1 46.76,27.78 ; C704.1 46.76,29.14 ; JP901.15 35.97,17.61 ; JP901.15 36.9,16.18 ; JP901.15 35.04,16.18 ; JP901.15 35.97,14.75 ; 6.86,8.22 C501.2 6.38,8.64 ; 27.9,21.77 C321.1 28.86,21.77 ; C911.1 25.29,10.93 ; C911.1 25.77,10.5 ; C911.1 24.81,10.5 ; 23.1,29.15 C308.2 ; C308.2 23.58,28.73 ; C308.2 24.06,29.15 ; C323.2 27.25,29.14 ; C323.2 26.29,29.14 ; C323.2 26.77,28.71 ; C512.2 12.08,14.93 ; C512.2 12.5,14.45 ; C512.2 12.08,13.97 ; C910.2 26.96,13 ; C910.2 25.88,12.02 ; C910.2 26.96,11.04 ; C910.2 28.04,12.02 ; JP600.19 32.19,3.51 ; JP600.19 31.31,2.63 ; JP600.19 32.19,1.75 ; 14.45,15.51 C507.2 13.97,15.93 ; C906.1 2.94,34.2 ; C906.1 1.58,34.2 ; C906.1 2.26,34.93 ; C906.1 2.26,33.47 ; JP600.20 32.19,5.51 ; JP600.20 33.07,4.63 ; JP600.20 32.19,3.75 ; JP600.20 31.31,4.63 ; C104.2 25.92,18.22 ; C104.2 26.6,17.49 ; C104.2 25.24,17.49 ; 47.59,36.26 C401.2 ; C401.2 48.33,36.94 ; C401.2 49.06,36.26 ; C401.2 48.33,35.58 ; 23.59,30.81 C307.2 24.07,31.23 ; 25.68,27.95 C304.1 24.72,27.95 ; 16.78,34.81 C325.2 ; C325.2 17.46,35.54 ; C325.2 17.46,34.08 ; C325.2 18.14,34.81 ; JP901.12 61.04,17.61 ; JP901.12 61.04,14.75 ; JP901.12 61.97,16.18 ; C508.2 16.2,9.32 ; C508.2 16.94,8.64 ; C508.2 15.47,8.64 ; 32.87,13.18 C905.1 32.14,13.86 ; 58.54,50.9 J600.2 ; J600.2 59.42,51.78 ; J600.2 57.66,51.78 ; J600.2 58.54,52.66 ; 27.44,16.73 R101.1 26.96,17.16 ; 11,8.22 C503.2 ; C503.2 11.48,8.64 ; C503.2 10.52,8.64 ; C302.1 27.28,27.92 ; C302.1 26.8,28.35 ; C302.1 26.32,27.92 ; 29.49,24.83 C326.1 30.45,24.83 ; C334.2 17.32,28.41 ; C334.2 16.64,27.68 ; C334.2 16.64,29.14 ; 13.62,48.28 ZD900.1 ; ZD900.1 15.17,49.54 ; ZD900.1 13.62,50.8 ; R102.1 24.74,18.84 ; R102.1 23.78,18.84 ; R102.1 24.26,18.42 ; 44.89,18.72 JP901.3 ; JP901.3 46.15,18.72 ; JP901.3 45.52,17.29 ; C904.2 20.42,46.97 ; C904.2 19.34,45.99 ; C904.2 21.5,45.99 ; 34.83,26.83 C318.1 35.51,26.1 ; 47.79,27.61 47.79,27.13 47.37,27.13 ; C504.2 10.43,8.64 ; C504.2 9.47,8.64 ; C504.2 9.95,8.22 ; 14.39,27.69 C309.1 ; C309.1 15.07,28.42 ; C309.1 14.39,29.15 ; C309.1 13.71,28.42 ; FB801.1 63.28,18.05 ; FB801.1 64.26,16.97 ; FB801.1 62.3,16.97 ; FB801.1 63.28,15.89 ; 50.36,23.6 R710.2 ; R710.2 49.88,24.03 ; R710.2 50.84,24.03 ; 17.16,15.95 C509.2 16.68,15.52 ; 20.69,23.58 C103.2 21.12,24.06 ; JP901.14 33.99,3.05 ; JP901.14 34.92,1.62 ; JP901.14 33.06,1.62 ; 15.76,51.62 C900.1 16.24,52.04 ; 50.42,30.08 C700.1 50.85,30.56
  BOTTOM w0.508: v2(51.92,27.89) 51.94,27.86 52.97,27.86 ; 52.97,27.86 FB702.2 ; 52.97,27.86 v2(51.93,26.82) ; 6,51.92 6.03,51.88 C901.1
  vias: v1(21.97,26.92) v1(22.54,12.05) v1(24.37,29.31) v1(25.19,15.01) v1(27.95,13.84) v2(0.88,1.14) v2(0.98,6.25) v2(1.07,10.17) v2(1.12,55.07) v2(1.14,50.62) v2(1.14,46.15) v2(1.14,42.52) v2(2.41,24.98) v2(2.64,30.31) v2(3.06,25.07) v2(3.6,13.14) v2(3.77,27.83) v2(4.07,10.59) v2(4.19,7.04) v2(5.2,55.45) v2(6.17,1) v2(6.35,28.74) v2(6.96,4.32) v2(9.13,6.16) v2(11.39,36.99) v2(11.85,34.25) v2(11.9,7.82) v2(12.24,6.18) v2(12.26,3.44) v2(12.56,29.1) v2(12.49,1.14) v2(12.84,36.28) v2(13.62,34.84) v2(14.11,47.38) v2(15.06,46.35) v2(15.67,6.16) v2(17.84,46.16) v2(17.83,1.14) v2(18.76,6.16) v2(18.8,52.06) v2(19.01,49.22) v2(19.08,37.59) v2(19.17,40.98) v2(19.24,55.36) v2(19.37,39.14) v2(19.31,35.43) v2(20.17,9.92) v2(20.37,7.75) v2(21.22,37.53) v2(21.31,35.55) v2(21.68,7.25) v2(21.76,11.47) v2(22.04,50.42) v2(22.25,1.14) v2(22.39,42.38) v2(23.47,6.91) v2(23.53,55.36) v2(24,49.16) v2(24.5,42.43) v2(25.93,50.53) v2(26.67,1.14) v2(27.95,55.36) v2(28.04,49.12) v2(28.59,12.95) v2(28.79,15.11) v2(29.45,17.91) v2(30.02,50.44) v2(30.07,42.54) v2(31.87,0.76) v2(32.06,42.06) v2(32.37,55.36) v2(32.73,6.78) v2(33.34,9.08) v2(34.21,50.28) v2(34.75,42.46) v2(35.61,13.53) v2(36.15,9.66) v2(36.15,7.45) v2(36.15,3.02) v2(36.15,0.83) v2(36.79,55.36) v2(37.89,30.15) v2(38.28,13.46) v2(38.19,11.04) v2(38.39,8.65) v2(40.32,1) v2(41.21,55.36) v2(41.77,19.05) v2(41.75,9.14) v2(41.85,12.94) v2(41.8,6.73) v2(43.75,25.44) v2(43.83,30.68) v2(43.83,27.91) v2(43.96,9.11) v2(43.92,1.04) v2(44.07,34.19) v2(44.06,16.61) v2(44.55,4.81) v2(44.97,12.56) v2(45.11,7.4) v2(45.39,2.57) v2(45.63,55.36) v2(46.47,9.42) v2(46.61,16.22) v2(47.44,34.48) v2(47.92,1.09) v2(49.09,23.84) v2(49.14,11.52) v2(49.19,8.89) v2(49.43,50.62) v2(49.71,21.98) v2(50.06,55.36) v2(50.09,2.2) v2(50.59,10.35) v2(50.69,7.1) v2(51.12,34.53) v2(51.11,29.64) v2(51.22,15.61) v2(51.27,14.49) v2(51.25,13.49) v2(51.6,1.04) v2(51.69,39.03) v2(52.27,8.32) v2(52.46,39.76) v2(52.48,15.58) v2(52.45,14.5) v2(52.48,13.51) v2(52.57,4.55) v2(53.18,39.08) v2(53.26,40.47) v2(53.38,7.01) v2(53.53,50.58) v2(53.53,22.03) v2(53.75,15.61) v2(53.68,14.5) v2(53.68,13.45) v2(53.85,23.7) v2(54.48,55.36) v2(54.57,37.58) v2(55.28,9.87) v2(55.28,1.09) v2(56.69,49.75) v2(57.04,2.29) v2(57.27,38.57) v2(58.33,40.59) v2(58.9,55.36) v2(59.25,1.09) v2(59.48,38.56) v2(59.48,14.22) v2(60.24,47.49) v2(60.38,51.13) v2(60.49,40.59) v2(60.76,14.02) v2(60.9,6.34) v2(60.9,3.71) v2(61.51,38.56) v2(63.41,38.56) v2(63.5,19.62) v2(63.67,40.59) v2(63.92,48.96) v2(64.11,14.11) v2(64.1,5.58) v2(65.32,38.56) v2(65.36,1.13) v2(65.44,41.35) v2(66.22,46.38) v2(66.33,19.66) v2(67.02,3.66) v2(67.11,42.74) v2(67.74,55.36) v2(67.93,40.07) v2(68.21,16.37) v2(69.03,46.79) v2(69.06,45.08) v2(69.23,1.18) v2(69.33,48.95) v2(69.8,19.77) v2(70.17,14.47) v2(70.38,12.78) v2(70.87,51.03) v2(70.88,5.16) v2(70.98,43.45) v2(71.46,16.2) v2(71.69,45.83) v2(71.71,39.33) v2(72.16,55.36) v2(72.49,8.64) v2(73.97,19.85) v2(74.09,52.04) v2(74.11,1.41) v2(75.06,46.89) v2(75.06,43.8) v2(75.02,39.56) v2(75.17,12.41) v2(75.58,8.72) v2(77.33,4.27) v2(77.74,55.36) v2(78,17.83) v2(78.08,3.28) v2(79.67,45.83) v2(79.77,12.64) v2(79.68,1.45) v2(80,8.18) v2(80.35,41.41) v2(80.4,51.63) v2(80.39,19.62)
